# Allegro board TIDM-DELFINO-ETHERCAT_ALLEGRO.brd
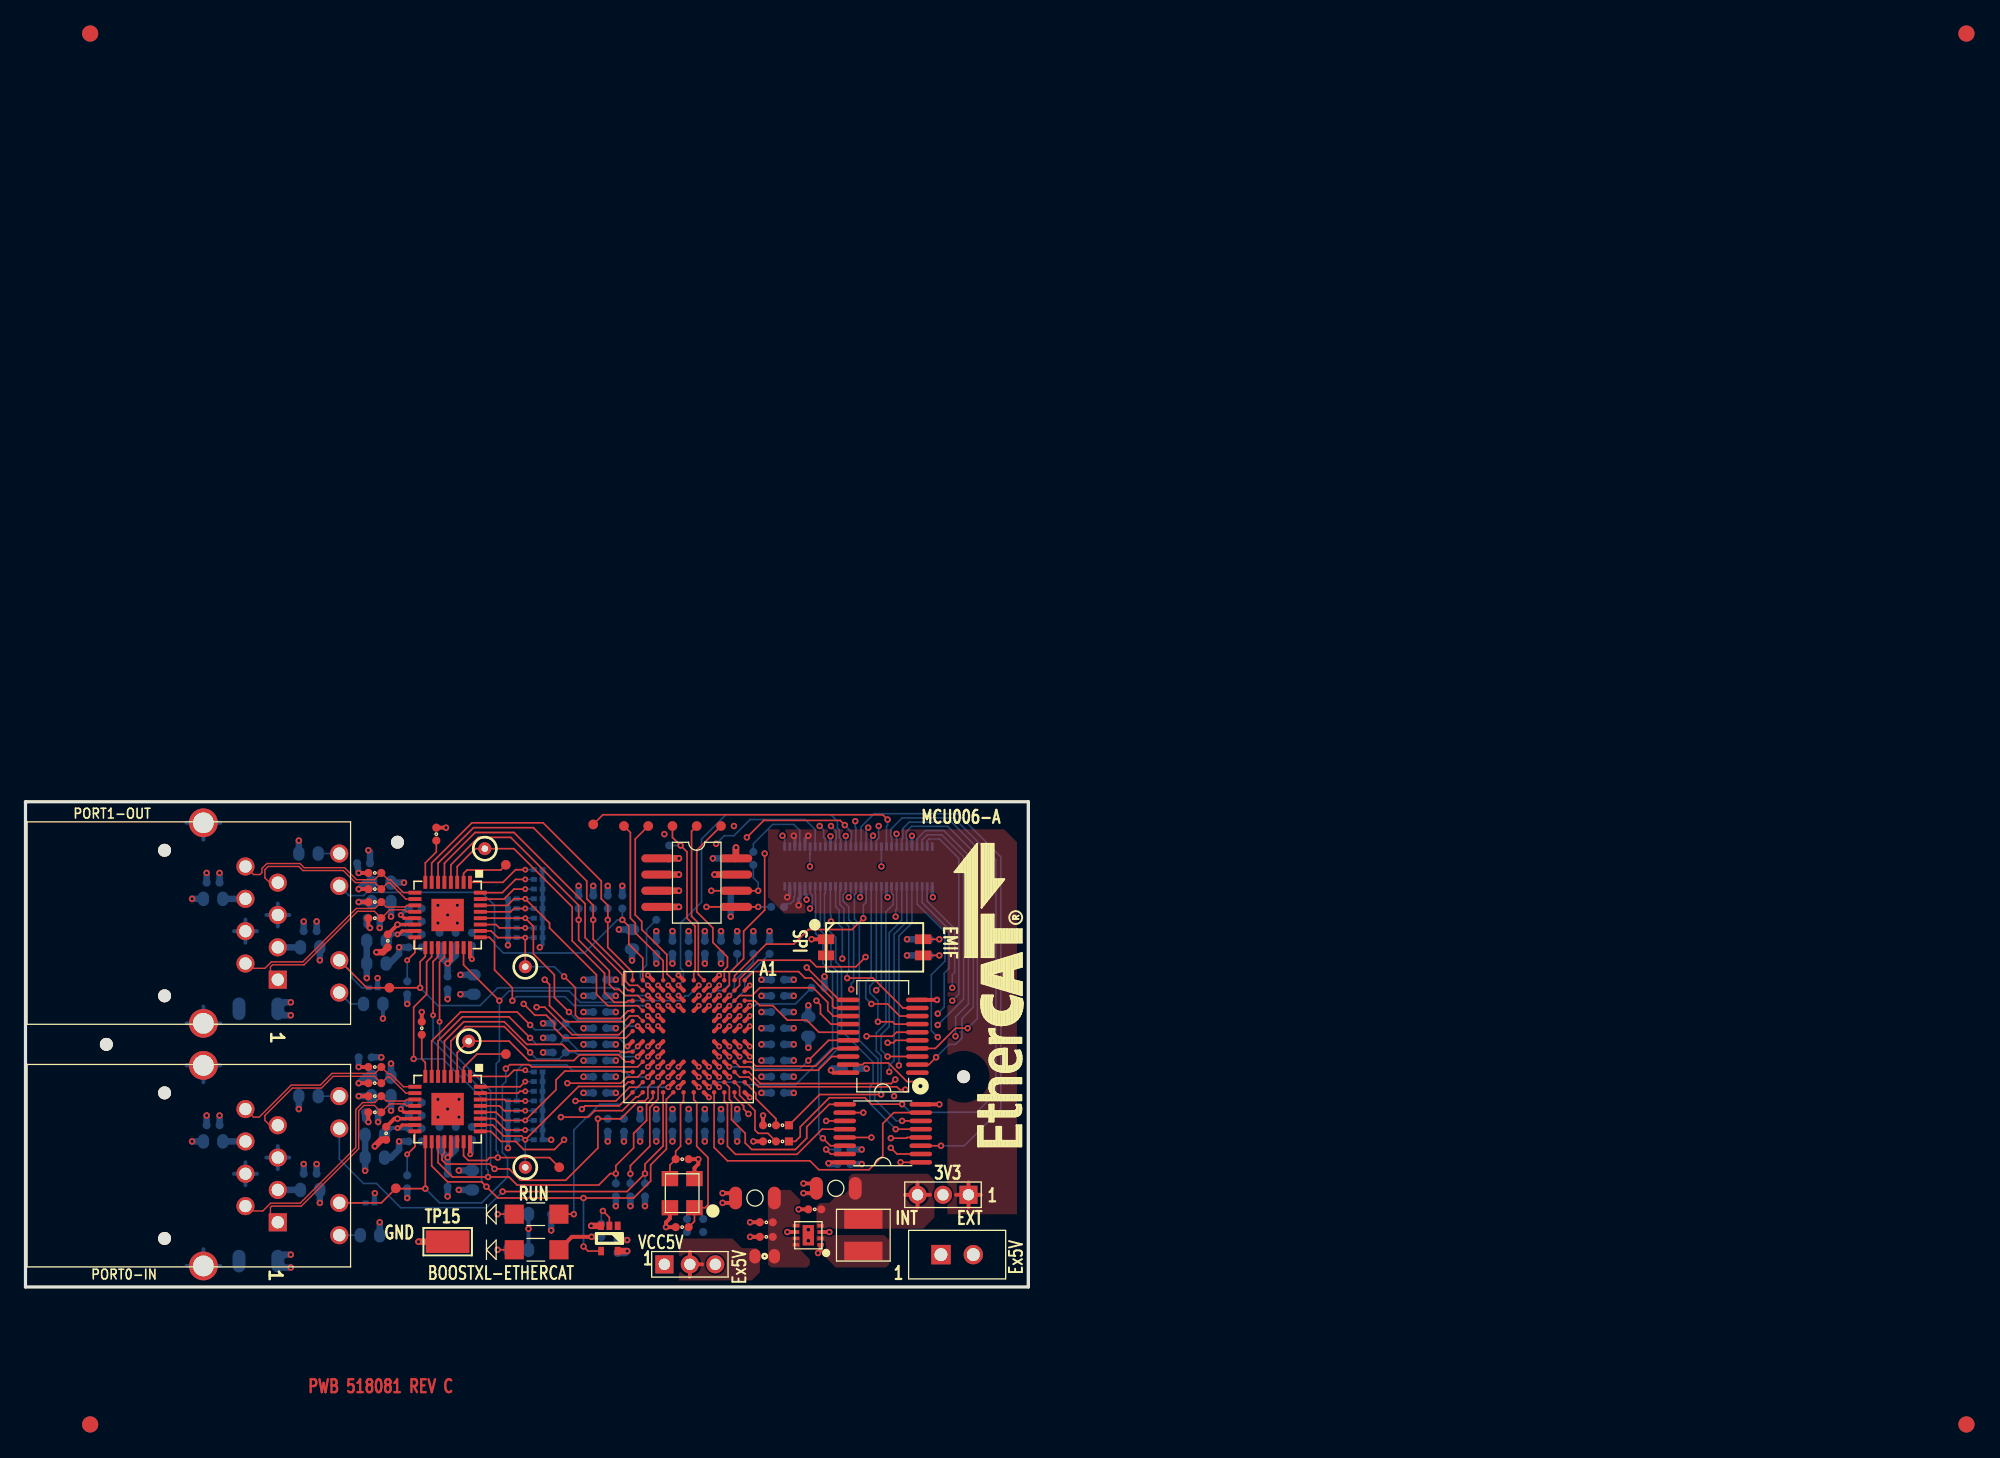
[diagram p0: board, top side]
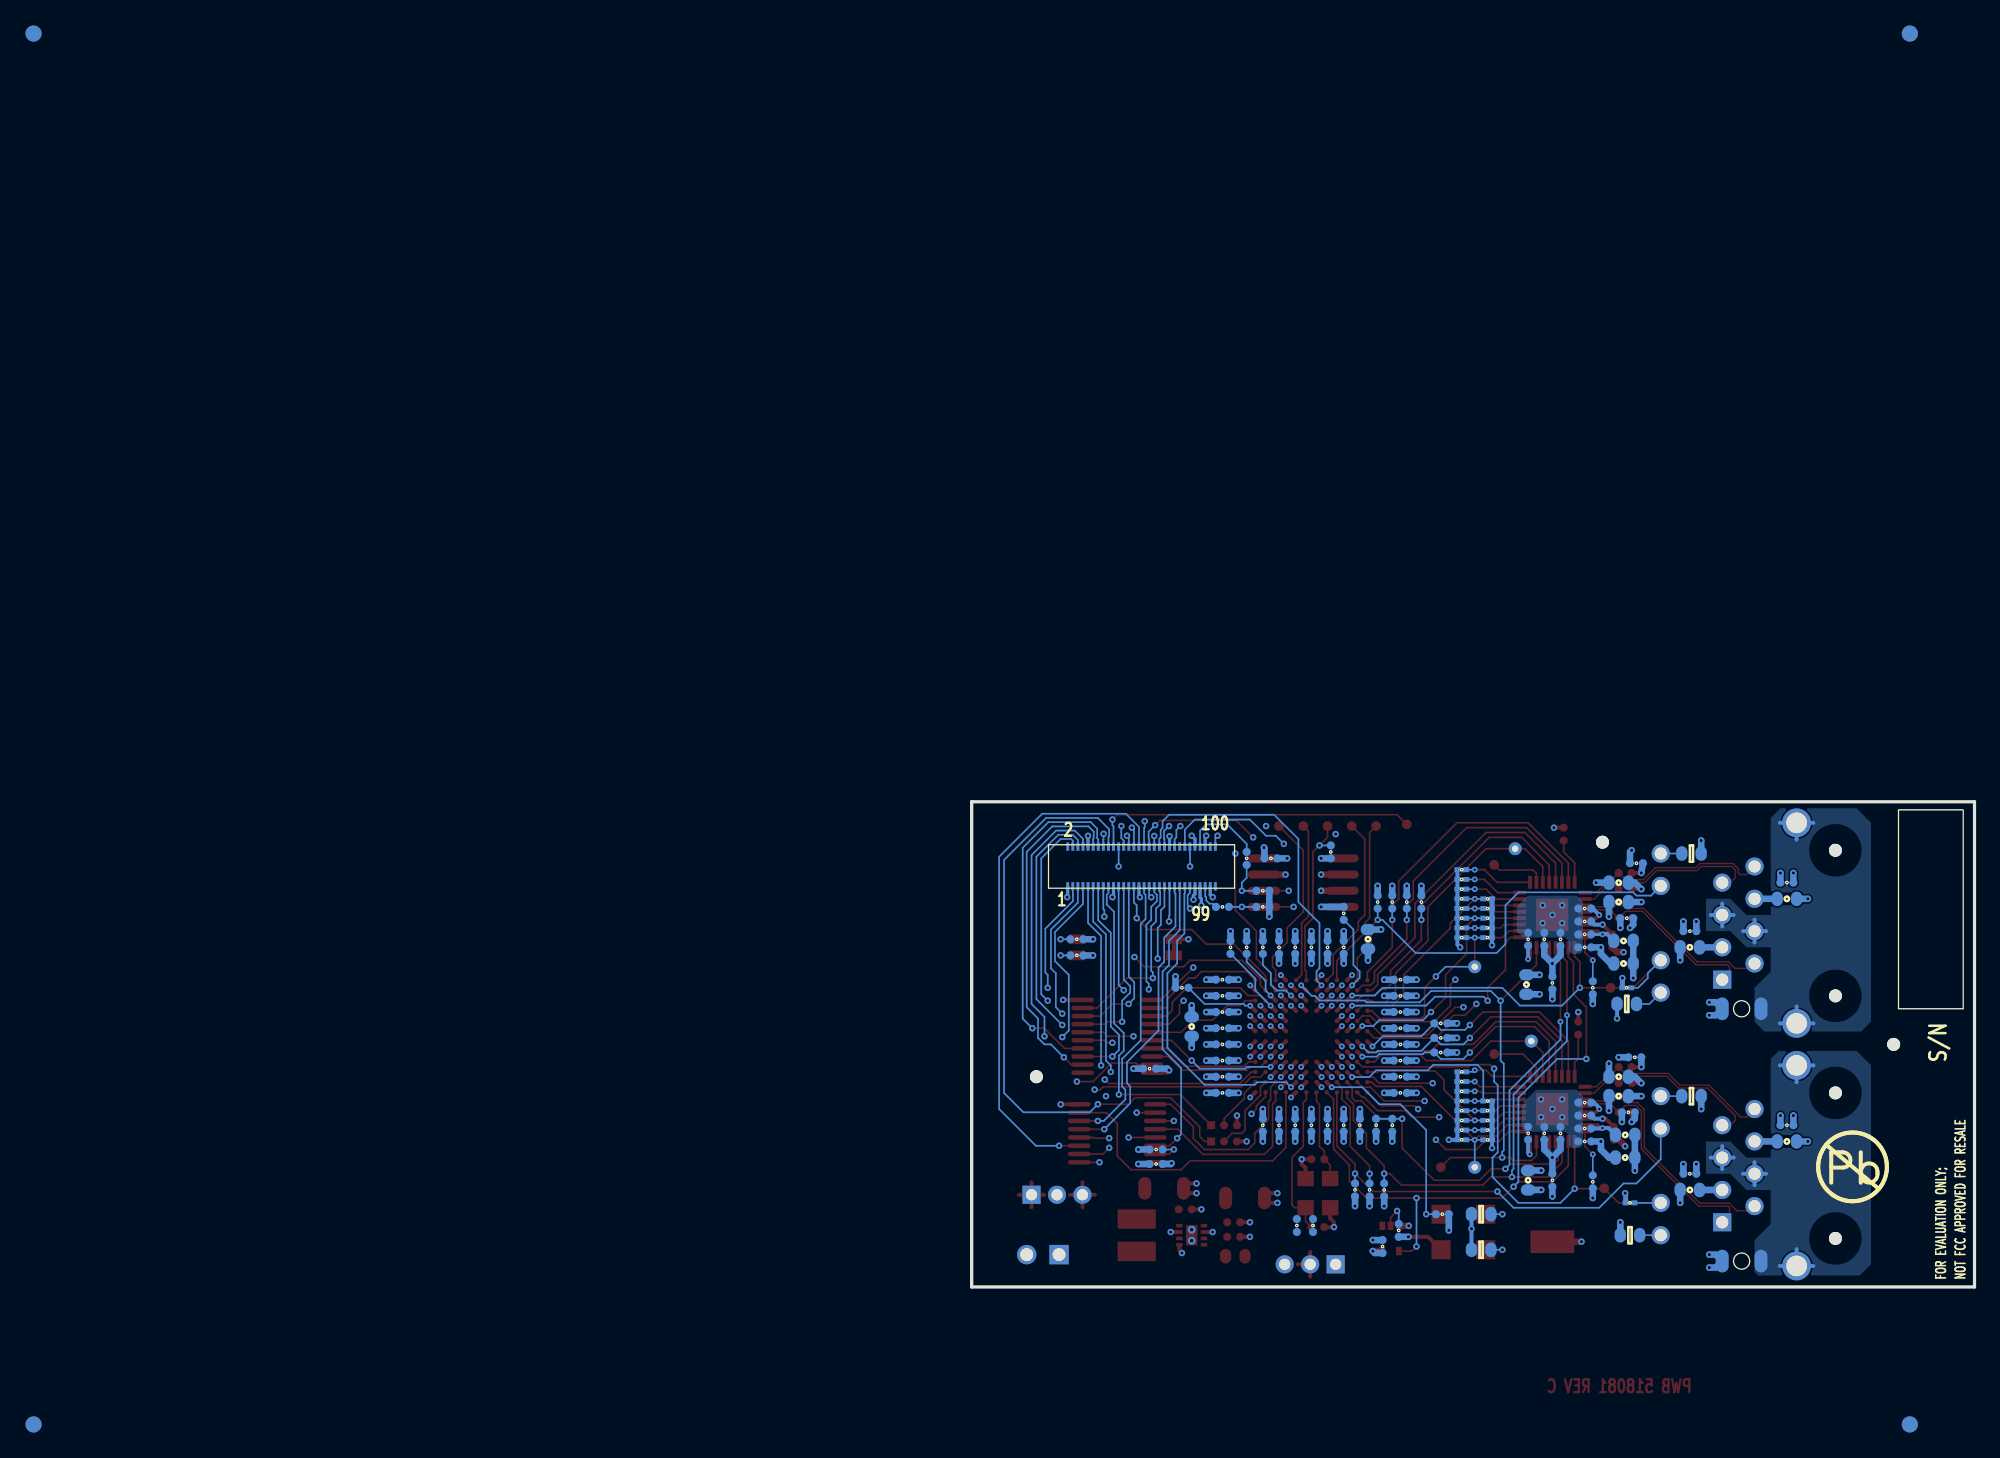
[diagram p1: board, bottom side, seen from below]

Outline 78.74 x 38.1 mm; copper layers: TOP, L2_GND, L3_ROUTE, L4_ROUTE, L5_PWR, BOTTOM. Coordinates in mm from the lower left corner of the outline.
Outline path: 0,38.1 78.74,38.1 78.74,0 0,0 0,38.1

## Design rules (mm)
net group MII0_RX1: nets MII0_RXM1 MII0_RXP1
net group MII0_TX1: nets MII0_TXM1 MII0_TXP1
net group MII1_RX1: nets MII1_RXM1 MII1_RXP1
net group MII1_TX1: nets MII1_TXM1 MII1_TXP1

## Placement (name value [footprint] x y rotation side)
C1  100pF  [C402-25]  28.45 27.18 270 top
C2  100pF  [C402-25]  28.32 12.07 270 top
C3  COMPONENTVALUE  [C402-25]  51.56 10.03 0 top
C4  X  [C1206-40X70]  63.63 7.75 180 top
C5  COMPONENTVALUE  [C402-25]  61.98 6.1 180 top
C6  X  [C1206-40X70]  57.28 6.98 180 top
C7  COMPONENTVALUE  [C402-25]  51.56 4.7 180 top
C8  COMPONENTVALUE  [C402-25]  58.17 5.08 180 top
C9  COMPONENTVALUE  [C402-25]  58.17 3.94 180 top
C10  COMPONENTVALUE  [C402-25]  46.48 3.18 90 bottom
C11  0.1uF  [C402-25]  26.54 33.27 180 bottom
C12  1uF  [C603-35X45]  27.94 31.75 0 bottom
C13  0.1uF  [C402-25]  14.73 31.75 180 bottom
C14  1uF  [C603-35X45]  14.73 30.48 180 bottom
C15  1uF  [C603-35X45]  27.94 30.23 180 bottom
C16  0.1uF  [C402-25]  30.61 29.72 0 bottom
C17  0.1uF  [C402-25]  27.3 28.96 0 bottom
C18  10nF  [C402-25]  30.61 28.7 0 bottom
C19  COMPONENTVALUE  [C402-25]  64.77 17.14 0 bottom
C20  0.1uF  [C402-25]  22.35 27.94 0 bottom
C21  0.1uF  [C402-25]  30.61 27.69 0 bottom
C22  X  [C603-35X45]  47.62 27.31 90 bottom
C23  0.1uF  [C402-25]  35.05 27.31 90 bottom
C24  10nF  [C402-25]  33.78 27.31 90 bottom
C25  1nF  [C402-25]  32.51 27.31 90 bottom
C26  10uF  [C603-35X45]  27.56 27.18 180 bottom
C27  COMPONENTVALUE  [C402-25]  54.61 26.67 90 bottom
C28  COMPONENTVALUE  [C402-25]  53.34 26.67 90 bottom
C29  COMPONENTVALUE  [C402-25]  52.07 26.67 90 bottom
C30  COMPONENTVALUE  [C402-25]  50.8 26.67 90 bottom
C31  COMPONENTVALUE  [C402-25]  49.53 26.67 90 bottom
C32  1nF  [C402-25]  30.61 26.67 0 bottom
C33  1uF  [C603-35X45]  22.35 26.67 0 bottom
C34  10uF  [C603-35X45]  27.56 25.4 180 bottom
C35  COMPONENTVALUE  [C402-25]  59.05 24.13 0 bottom
C36  COMPONENTVALUE  [C402-25]  45.09 24.13 180 bottom
C37  100pF  [C402-25]  33.15 23.88 270 bottom
C38  10uF  [C603-35X45]  35.18 23.75 270 bottom
C39  COMPONENTVALUE  [C402-25]  59.05 22.86 0 bottom
C40  COMPONENTVALUE  [C402-25]  45.09 22.86 180 bottom
C41  4700pF  [C1206-40X70]  18.29 21.84 180 bottom
C42  COMPONENTVALUE  [C402-25]  59.05 21.59 0 bottom
C43  COMPONENTVALUE  [C402-25]  45.09 21.59 180 bottom
C44  X  [C603-35X45]  61.47 20.45 90 bottom
C45  COMPONENTVALUE  [C402-25]  59.05 20.32 0 bottom
C46  COMPONENTVALUE  [C402-25]  45.09 20.32 180 bottom
C47  COMPONENTVALUE  [C402-25]  55.24 33.66 0 bottom
C48  COMPONENTVALUE  [C402-25]  59.05 19.05 0 bottom
C49  COMPONENTVALUE  [C402-25]  45.09 19.05 180 bottom
C50  0.1uF  [C402-25]  26.67 18.03 0 bottom
C51  COMPONENTVALUE  [C402-25]  59.05 17.78 0 bottom
C52  COMPONENTVALUE  [C402-25]  45.09 17.78 180 bottom
C53  COMPONENTVALUE  [C402-25]  59.05 16.51 0 bottom
C54  COMPONENTVALUE  [C402-25]  45.09 16.51 180 bottom
C55  1uF  [C603-35X45]  27.94 16.51 0 bottom
C56  COMPONENTVALUE  [C402-25]  59.05 15.24 0 bottom
C57  COMPONENTVALUE  [C402-25]  45.09 15.24 180 bottom
C58  1uF  [C603-35X45]  27.94 14.99 180 bottom
C59  0.1uF  [C402-25]  30.61 14.48 0 bottom
C60  0.1uF  [C402-25]  27.18 13.72 180 bottom
C61  10nF  [C402-25]  30.61 13.46 0 bottom
C62  COMPONENTVALUE  [C402-25]  55.88 12.7 270 bottom
C63  COMPONENTVALUE  [C402-25]  54.61 12.7 270 bottom
C64  COMPONENTVALUE  [C402-25]  53.34 12.7 270 bottom
C65  COMPONENTVALUE  [C402-25]  52.07 12.7 270 bottom
C66  COMPONENTVALUE  [C402-25]  50.8 12.7 270 bottom
C67  COMPONENTVALUE  [C402-25]  49.53 12.7 270 bottom
C68  COMPONENTVALUE  [C402-25]  48.26 12.7 270 bottom
C69  0.1uF  [C402-25]  14.73 12.7 180 bottom
C70  0.1uF  [C402-25]  30.61 12.45 0 bottom
C71  0.1uF  [C402-25]  35.05 12.07 90 bottom
C72  10nF  [C402-25]  33.78 12.07 90 bottom
C73  1nF  [C402-25]  32.51 12.07 90 bottom
C74  10uF  [C603-35X45]  27.43 11.94 180 bottom
C75  COMPONENTVALUE  [C402-25]  64.26 9.65 0 bottom
C76  1nF  [C402-25]  30.61 11.43 0 bottom
C77  1uF  [C603-35X45]  14.73 11.43 180 bottom
C78  10uF  [C603-35X45]  27.43 10.16 180 bottom
C79  0.1uF  [C402-25]  22.35 8.89 0 bottom
C80  10uF  [C603-35X45]  35.05 8.38 270 bottom
C81  100pF  [C402-25]  33.15 8.38 270 bottom
C82  1uF  [C603-35X45]  22.35 7.62 0 bottom
C83  4700pF  [C1206-40X70]  18.29 2.03 180 bottom
DS1  X  [LED1206-59X59]  40.13 5.71 0 top
DS2  X  [LED1206-59X59]  40.13 2.92 0 top
J3  X  [HDR1X3-6040-2MM]  74.04 7.24 180 top
J6  VALUE  [DF40C_60DS]  65.41 33.02 180 bottom
J9  X  [CONN2-EH]  71.88 2.54 0 top
J10  X  [HDR1X3-6040-2MM]  50.16 1.78 0 top
L1  0  [L603-35X45]  58.04 2.41 0 top
L2  X  [IND-LQH44P]  65.79 4.06 90 top
NOREF  -  []  0 103.5 0 top
NOREF#2  -  [unnamed#2]  152.4 98.42 0 top
NOREF#3  -  [unnamed#2]  5.08 -10.79 0 top
NOREF#4  -  [unnamed#2]  152.4 -10.79 0 top
NOREF#5  -  []  -259.21 -258.7 0 top
NOREF#6  -  []  0 0 90 top
NOREF#7  -  [unnamed#3]  73.66 16.51 0 top
NOREF#8  -  []  154.18 39.5 0 top
NOREF#9  -  [unnamed#2]  5.08 98.42 0 top
NOREF#10  -  [unnamed#3]  29.21 34.92 0 top
NOREF#11  -  []  0 0 0 top
NOREF#12  -  [unnamed#3]  6.35 19.05 0 top
NOREF#13  -  []  157.48 -15.88 90 top
NOREF#14  -  []  -259.21 -258.7 0 top
NOREF#15  -  [unnamed#2]  152.4 -10.79 180 bottom
NOREF#16  -  [unnamed#2]  152.4 98.42 180 bottom
NOREF#17  -  [unnamed#2]  5.08 -10.79 180 bottom
NOREF#18  -  [unnamed#2]  5.08 98.42 180 bottom
NOREF#19  -  []  12.95 5.97 180 bottom
P0  -  [RJ45-PULSE_J1-SHLD]  19.81 5.08 270 top
P1  -  [RJ45-PULSE_J1-SHLD]  19.81 24.13 270 top
R1  10K  [R402-25]  32.26 35.56 270 top
R2  49.9  [R402-25]  27.43 32.51 180 top
R3  49.9  [R402-25]  27.43 31.24 180 top
R4  49.9  [R402-25]  27.43 30.23 180 top
R5  49.9  [R402-25]  27.43 28.96 180 top
R6  COMPONENTVALUE  [R402-25]  59.05 29.85 0 bottom
R7  COMPONENTVALUE  [R402-25]  57.15 33.66 270 bottom
R8  10K  [R402-25]  31.11 20.32 270 top
R9  49.9  [R402-25]  27.43 17.27 180 top
R10  49.9  [R402-25]  27.43 16 180 top
R11  49.9  [R402-25]  27.43 14.99 180 top
R12  49.9  [R402-25]  27.43 13.72 180 top
R13  COMPONENTVALUE  [R402-25]  45.21 4.45 270 bottom
R14  X  [R603-35X45]  22.23 34.04 180 bottom
R15  2.2K  [R201-18P5X15]  40.26 32.77 0 bottom
R16  2.2K  [R201-18P5X15]  40.26 32 0 bottom
R17  2.2K  [R201-18P5X15]  40.26 31.24 0 bottom
R18  COMPONENTVALUE  [R402-25]  57.15 26.67 90 bottom
R19  COMPONENTVALUE  [R402-25]  58.42 26.67 90 bottom
R20  COMPONENTVALUE  [R402-25]  55.88 26.67 90 bottom
R21  COMPONENTVALUE  [R402-25]  50.55 34.16 90 bottom
R22  2.2K  [R201-18P5X15]  40.26 30.48 0 bottom
R23  NO-POP  [R201-18P5X15]  38.23 30.48 0 bottom
R24  COMPONENTVALUE  [R402-25]  49.53 29.34 90 bottom
R25  COMPONENTVALUE  [R402-25]  46.86 30.23 90 bottom
R26  COMPONENTVALUE  [R402-25]  45.72 30.23 90 bottom
R27  COMPONENTVALUE  [R402-25]  44.58 30.23 90 bottom
R28  COMPONENTVALUE  [R402-25]  43.43 30.23 90 bottom
R29  NO-POP  [R201-18P5X15]  40.26 29.72 0 bottom
R30  2.2K  [R201-18P5X15]  38.23 29.72 0 bottom
R31  NO-POP  [R201-18P5X15]  40.26 28.96 0 bottom
R32  2.2K  [R201-18P5X15]  38.23 28.96 0 bottom
R33  COMPONENTVALUE  [R402-25]  70.48 27.31 180 bottom
R34  COMPONENTVALUE  [R402-25]  70.48 26.04 180 bottom
R35  NO-POP  [R201-18P5X15]  40.26 28.19 0 bottom
R36  2.2K  [R201-18P5X15]  38.23 28.19 0 bottom
R37  2.2K  [R201-18P5X15]  40.26 27.43 0 bottom
R38  NO-POP  [R201-18P5X15]  38.23 27.43 0 bottom
R39  COMPONENTVALUE  [R402-25]  62.23 23.5 180 bottom
R40  4.87K 1%  [R402-25]  29.97 23.5 270 bottom
R41  2.2K  [R201-18P5X15]  27.3 23.5 180 bottom
R42  COMPONENTVALUE  [R402-25]  55.88 29.85 180 bottom
R43  330  [R603-35X45]  27.3 22.23 0 bottom
R44  COMPONENTVALUE  [R402-25]  55.88 31.11 180 bottom
R45  COMPONENTVALUE  [R402-25]  41.91 20.7 180 bottom
R46  COMPONENTVALUE  [R402-25]  41.91 19.56 180 bottom
R47  COMPONENTVALUE  [R402-25]  41.91 18.41 180 bottom
R48  2.2K  [R201-18P5X15]  40.26 16.89 0 bottom
R49  2.2K  [R201-18P5X15]  40.26 16.13 0 bottom
R50  2.2K  [R201-18P5X15]  40.26 15.37 0 bottom
R51  X  [R603-35X45]  22.23 14.99 180 bottom
R52  2.2K  [R201-18P5X15]  40.26 14.61 0 bottom
R53  NO-POP  [R201-18P5X15]  38.23 14.61 0 bottom
R54  2.2K  [R201-18P5X15]  40.26 13.84 0 bottom
R55  NO-POP  [R201-18P5X15]  38.23 13.84 0 bottom
R56  NO-POP  [R201-18P5X15]  40.26 13.08 0 bottom
R57  2.2K  [R201-18P5X15]  38.23 13.08 0 bottom
R58  COMPONENTVALUE  [R402-25]  64.26 10.8 180 bottom
R59  COMPONENTVALUE  [R402-25]  46.99 12.7 270 bottom
R60  COMPONENTVALUE  [R402-25]  45.72 12.7 270 bottom
R61  NO-POP  [R201-18P5X15]  40.26 12.32 0 bottom
R62  2.2K  [R201-18P5X15]  38.23 12.32 0 bottom
R63  2.2K  [R201-18P5X15]  40.26 11.56 0 bottom
R64  NO-POP  [R201-18P5X15]  38.23 11.56 0 bottom
R65  4.87K 1%  [R402-25]  29.97 8.26 270 bottom
R66  COMPONENTVALUE  [R402-25]  48.64 7.62 270 bottom
R67  COMPONENTVALUE  [R402-25]  47.5 7.62 270 bottom
R68  COMPONENTVALUE  [R402-25]  46.35 7.62 270 bottom
R69  2.2K  [R201-18P5X15]  27.05 6.6 180 bottom
R70  COMPONENTVALUE  [R402-25]  53.21 4.83 90 bottom
R71  COMPONENTVALUE  [R402-25]  51.94 4.83 90 bottom
R72  X  [R603-35X45]  38.73 5.71 180 bottom
R73  COMPONENTVALUE  [R402-25]  41.78 5.71 180 bottom
R74  330  [R603-35X45]  27.05 4.06 0 bottom
R75  X  [R603-35X45]  38.73 2.92 180 bottom
RJ1  COMPONENTVALUE  [JMP402-25]  59.44 12.7 180 top
RJ2  COMPONENTVALUE  [JMP402-25]  59.44 11.43 180 top
SW1  X  [SW2-30X50-TDA]  66.67 26.67 270 top
TP1  -  [TP1-4020]  36.07 34.42 0 top
TP2  COMPONENTVALUE  [TP30]  46.99 36.19 90 top
TP3  COMPONENTVALUE  [TP30]  48.9 36.19 90 top
TP4  COMPONENTVALUE  [TP30]  50.8 36.19 90 top
TP5  COMPONENTVALUE  [TP30]  52.7 36.19 90 top
TP6  COMPONENTVALUE  [TP30]  54.61 36.19 90 top
TP7  COMPONENTVALUE  [TP30]  37.72 33.15 0 top
TP8  -  [TP1-4020]  39.24 25.15 0 top
TP9  TestPoint1  [TP30]  28.57 23.5 270 top
TP10  -  [TP1-4020]  34.8 19.3 0 top
TP11  COMPONENTVALUE  [TP30]  37.72 18.29 0 top
TP12  -  [TP1-4020]  39.24 9.4 0 top
TP13  COMPONENTVALUE  [TP30]  41.91 9.4 0 top
TP14  TestPoint1  [TP30]  29.08 7.75 270 top
TP15  -  [TP1-70X135]  33.15 3.56 270 top
TP16  COMPONENTVALUE  [TP30]  44.58 36.32 0 top
U1  VALUE  [DCK-5]  45.85 3.81 180 top
U2  X  [DBQ20-14X70]  67.31 19.68 90 top
U3  TLK105  [QFN32_202SQ]  33.15 29.21 180 top
U4  X  [SO8-25X75-295]  52.7 31.75 270 top
U5  -  [BGA128-8MM]  52.07 19.68 270 top
U6  TLK105  [QFN32_202SQ]  33.15 13.97 180 top
U7  X  [TSSOP16-14X70]  67.31 12.07 90 top
U8  X  [DSG8-11X20]  61.47 4.06 90 top
Y1  -  [XTAL4-47X51-ECX32]  51.56 7.37 90 top

## Library data of the parts
C1 C2 C8 C10 C11 C16-C19 C21 C23-C25 C27-C32 C35-C37 C39 C40 C42 C43 C45 C46 C48-C54 C56 C57 C59-C68 C70-C73 C75 C76 C81 = CAP NP: Tolerance: TOLERANCE; User Part Number: USERPART#
C3 C7 = CAP NP_3: Tolerance: TOLERANCE; User Part Number: USERPART#
C4 C6 = CAP P_0
C5 C9 = CAP NP_1: Tolerance: TOLERANCE; User Part Number: USERPART#
C12 C14 C15 C26 C33 C34 C38 C55 C58 C74 C77 C78 C80 C82 = CAP NP: Tolerance: X; User Part Number: X
C13 C20 C69 C79 = CAP NP_0: Tolerance: TOLERANCE; User Part Number: USERPART#
C22 C44 = CAP NP
C41 C83 = CAP NP_0: Tolerance: X; User Part Number: X
C47 = CAP .1 uF 10% 0603: Tolerance: TOLERANCE; User Part Number: USERPART#
DS1 DS2 = LED_0
J3 J10 = HEADER 3
J6 = HEADER 30x2/SM: Tolerance: TOL; User Part Number: PART#
J9 = HEADER 2
L1 = FERRITE CHIP_0: Tolerance: X; User Part Number: X
L2 = INDUCTOR_0
P0 P1 = J1011F01PNL
R1-R12 R21 R39 R58 R70 R71 = R: Tolerance: TOLERANCE; User Part Number: USERPART#
R13 R18-R20 R24-R28 R33 R34 R40 R42 R44-R47 R59 R60 R65-R68 R73 = RESISTOR_0: Tolerance: TOLERANCE; User Part Number: USERPART#
R14 R51 R72 R75 = RESISTOR_0
R15-R17 R22 R23 R29-R32 R35-R38 R41 R48-R50 R52-R57 R61-R64 R69 = RESISTOR_0: User Part Number: USERPART#; Tolerance: TOLERANCE
R43 R74 = RESISTOR_0: User Part Number: X; Tolerance: X
RJ1 RJ2 = RJUMP3: Tolerance: TOLERANCE; User Part Number: USERPART#
SW1 = SW DIP-2
TP1 TP8 TP10 TP12 = TEST POINT_1
TP2-TP7 TP9 TP11 TP13 TP14 TP16 = TestPoint1: Tolerance: TOLERANCE; User Part Number: USERPART#
TP15 = SMT-TP
U1 = SN74LVC1GU04_0: Tolerance: TOL; User Part Number: PART#
U2 = 74PCT245_0
U3 U6 = TLK105: Tolerance: TOL; User Part Number: PART#
U4 = 24WC256
U5 = ET1100
U7 = SN74CBT3257PW
U8 = TPS62000
Y1 = CRYSTAL 4-PIN_0

## Footprints (pads in the part's own frame, mm; a bottom-side part is the same pattern mirrored in y, then rotated)
BGA128-8MM
  round 0.351 smd: A1(-4.401,4.401) A2(-3.6,4.401) A3(-2.8,4.401) A4(-2,4.401) A5(-1.2,4.401) A6(-0.4,4.401) A7(0.4,4.401) A8(1.2,4.401) A9(2,4.401) A10(2.8,4.401) A11(3.6,4.401) A12(4.401,4.401) B1(-4.401,3.6) B2(-3.6,3.6) B3(-2.8,3.6) B4(-2,3.6) B5(-1.2,3.6) B6(-0.4,3.6) B7(0.4,3.6) B8(1.2,3.6) B9(2,3.6) B10(2.8,3.6) B11(3.6,3.6) B12(4.401,3.6) C1(-4.401,2.8) C2(-3.6,2.8) C3(-2.8,2.8) C4(-2,2.8) C5(-1.2,2.8) C6(-0.4,2.8) C7(0.4,2.8) C8(1.2,2.8) C9(2,2.8) C10(2.8,2.8) C11(3.6,2.8) C12(4.401,2.8) D1(-4.401,2) D2(-3.6,2) D3(-2.8,2) D4(-2,2) D5(-1.2,2) D6(-0.4,2) D7(0.4,2) D8(1.2,2) D9(2,2) D10(2.8,2) D11(3.6,2) D12(4.401,2) E1(-4.401,1.2) E2(-3.6,1.2) E3(-2.8,1.2) E4(-2,1.2) E9(2,1.2) E10(2.8,1.2) E11(3.6,1.2) E12(4.401,1.2) F1(-4.401,0.4) F2(-3.6,0.4) F3(-2.8,0.4) F4(-2,0.4) F9(2,0.4) F10(2.8,0.4) F11(3.6,0.4) F12(4.401,0.4) G1(-4.401,-0.4) G2(-3.6,-0.4) G3(-2.8,-0.4) G4(-2,-0.4) G9(2,-0.4) G10(2.8,-0.4) G11(3.6,-0.4) G12(4.401,-0.4) H1(-4.401,-1.2) H2(-3.6,-1.2) H3(-2.8,-1.2) H4(-2,-1.2) H9(2,-1.2) H10(2.8,-1.2) H11(3.6,-1.2) H12(4.401,-1.2) J1(-4.401,-2) J2(-3.6,-2) J3(-2.8,-2) J4(-2,-2) J5(-1.2,-2) J6(-0.4,-2) J7(0.4,-2) J8(1.2,-2) J9(2,-2) J10(2.8,-2) J11(3.6,-2) J12(4.401,-2) K1(-4.401,-2.8) K2(-3.6,-2.8) K3(-2.8,-2.8) K4(-2,-2.8) K5(-1.2,-2.8) K6(-0.4,-2.8) K7(0.4,-2.8) K8(1.2,-2.8) K9(2,-2.8) K10(2.8,-2.8) K11(3.6,-2.8) K12(4.401,-2.8) L1(-4.401,-3.6) L2(-3.6,-3.6) L3(-2.8,-3.6) L4(-2,-3.6) L5(-1.2,-3.6) L6(-0.4,-3.6) L7(0.4,-3.6) L8(1.2,-3.6) L9(2,-3.6) L10(2.8,-3.6) L11(3.6,-3.6) L12(4.401,-3.6) M1(-4.401,-4.401) M2(-3.6,-4.401) M3(-2.8,-4.401) M4(-2,-4.401) M5(-1.2,-4.401) M6(-0.4,-4.401) M7(0.4,-4.401) M8(1.2,-4.401) M9(2,-4.401) M10(2.8,-4.401) M11(3.6,-4.401) M12(4.401,-4.401)
C402-25
  round 0.635 smd: 1(-0.508,0) 2(0.508,0)
C603-35X45
  oval 0.889x1.143 smd: 1(-0.762,0) 2(0.762,0)
C1206-40X70
  oval 1.016x1.778 smd: 1(-1.524,0) 2(1.524,0)
CONN2-EH
  rect 1.524x1.524 hole 1.016: 1(0,0)
  round 1.524 hole 1.016: 2(2.54,0)
DBQ20-14X70
  oval 0.356x1.778 smd: 1(-2.857,-2.718) 2(-2.223,-2.718) 3(-1.587,-2.718) 4(-0.953,-2.718) 5(-0.318,-2.718) 6(0.318,-2.718) 7(0.953,-2.718) 8(1.587,-2.718) 9(2.223,-2.718) 10(2.857,-2.718) 11(2.857,2.718) 12(2.223,2.718) 13(1.587,2.718) 14(0.953,2.718) 15(0.318,2.718) 16(-0.318,2.718) 17(-0.953,2.718) 18(-1.587,2.718) 19(-2.223,2.718) 20(-2.857,2.718)
DCK-5
  rect 0.46x0.66 smd: 1(-0.65,-0.991) 2(0,-0.991) 3(0.65,-0.991) 4(0.65,0.991) 5(-0.65,0.991)
DF40C_60DS
  rect 0.229x0.66 smd: 1(-5.796,-1.56) 2(-5.796,1.56) 3(-5.397,-1.56) 4(-5.397,1.56) 5(-4.999,-1.56) 6(-4.999,1.56) 7(-4.597,-1.56) 8(-4.597,1.56) 9(-4.199,-1.56) 10(-4.199,1.56) 11(-3.797,-1.56) 12(-3.797,1.56) 13(-3.399,-1.56) 14(-3.399,1.56) 15(-3,-1.56) 16(-3,1.56) 17(-2.598,-1.56) 18(-2.598,1.56) 19(-2.2,-1.56) 20(-2.2,1.56) 21(-1.798,-1.56) 22(-1.798,1.56) 23(-1.4,-1.56) 24(-1.4,1.56) 25(-1.001,-1.56) 26(-1.001,1.56) 27(-0.599,-1.56) 28(-0.599,1.56) 29(-0.201,-1.56) 30(-0.201,1.56) 31(0.201,-1.56) 32(0.201,1.56) 33(0.599,-1.56) 34(0.599,1.56) 35(0.998,-1.56) 36(0.998,1.56) 37(1.4,-1.56) 38(1.4,1.56) 39(1.798,-1.56) 40(1.798,1.56) 41(2.2,-1.56) 42(2.2,1.56) 43(2.598,-1.56) 44(2.598,1.56) 45(2.997,-1.56) 46(2.997,1.56) 47(3.399,-1.56) 48(3.399,1.56) 49(3.797,-1.56) 50(3.797,1.56) 51(4.199,-1.56) 52(4.199,1.56) 53(4.597,-1.56) 54(4.597,1.56) 55(4.999,-1.56) 56(4.999,1.56) 57(5.397,-1.56) 58(5.397,1.56) 59(5.796,-1.56) 60(5.796,1.56)
DSG8-11X20
  rect 0.279x0.508 smd: 1(-0.75,-0.965) 2(-0.25,-0.965) 3(0.25,-0.965) 4(0.75,-0.965) 5(0.75,0.965) 6(0.25,0.965) 7(-0.25,0.965) 8(-0.75,0.965)
  rect 1.6x0.889 smd: 9(0,0)
HDR1X3-6040-2MM
  rect 1.422x1.422 hole 0.889: 1(0,0)
  round 1.422 hole 0.889: 2(1.999,0) 3(3.998,0)
IND-LQH44P
  rect 1.524x2.997 smd: 1(-1.27,0) 2(1.27,0)
JMP402-25
  rect 0.635x0.635 smd: 1(-0.508,0)
  round 0.635 smd: 2(0.508,0) 3(1.524,0)
L603-35X45
  oval 0.889x1.143 smd: 1(-0.762,0) 2(0.762,0)
LED1206-59X59
  rect 1.499x1.499 smd: 1(-1.753,0) 2(1.753,0)
QFN32_202SQ
  rect 0.305x1.016 smd: 1(-1.753,-2.565) 2(-1.252,-2.565) 3(-0.752,-2.565) 4(-0.251,-2.565) 5(0.251,-2.565) 6(0.752,-2.565) 7(1.252,-2.565) 8(1.753,-2.565) 17(1.753,2.565) 18(1.252,2.565) 19(0.752,2.565) 20(0.251,2.565) 21(-0.251,2.565) 22(-0.752,2.565) 23(-1.252,2.565) 24(-1.753,2.565)
  rect 1.016x0.305 smd: 9(2.565,-1.753) 10(2.565,-1.252) 11(2.565,-0.752) 12(2.565,-0.251) 13(2.565,0.251) 14(2.565,0.752) 15(2.565,1.252) 16(2.565,1.753) 25(-2.565,1.753) 26(-2.565,1.252) 27(-2.565,0.752) 28(-2.565,0.251) 29(-2.565,-0.251) 30(-2.565,-0.752) 31(-2.565,-1.252) 32(-2.565,-1.753)
  rect 2.54x2.54 smd: 33(0,0)
R201-18P5X15
  rect 0.47x0.381 smd: 1(-0.343,0) 2(0.343,0)
R402-25
  round 0.635 smd: 1(-0.508,0) 2(0.508,0)
R603-35X45
  oval 0.889x1.143 smd: 1(-0.762,0) 2(0.762,0)
RJ45-PULSE_J1-SHLD
  round 1.016 hole 3.251 unplated: (-10.16,-8.89) (1.27,-8.89)
  rect 1.422x1.422 hole 0.965: 1(0,0)
  round 1.422 hole 0.965: 2(-1.27,-2.54) 3(-2.54,0) 4(-3.81,-2.54) 5(-5.08,0) 6(-6.35,-2.54) 7(-7.62,0) 8(-8.89,-2.54) 9(1.016,4.826) 10(-1.524,4.826) 11(-7.366,4.826) 12(-9.906,4.826)
  round 2.261 hole 1.626: 13(-12.319,-5.842) 14(3.429,-5.842)
SO8-25X75-295
  oval 0.635x2.54 smd: 1(-1.905,-3.086) 2(-0.635,-3.086) 3(0.635,-3.086) 4(1.905,-3.086) 5(1.905,3.086) 6(0.635,3.086) 7(-0.635,3.086) 8(-1.905,3.086)
SW2-30X50-TDA
  rect 0.762x1.27 smd: 1(-0.635,-3.81) 2(0.635,-3.81) 3(0.635,3.81) 4(-0.635,3.81)
TP1-70X135
  rect 1.778x3.429 smd: 1(0,0)
TP1-4020
  round 1.016 hole 0.508: 1(0,0)
TP30
  round 0.762 smd: 1(0,0)
TSSOP16-14X70
  oval 0.356x1.778 smd: 1(-2.276,-2.987) 2(-1.626,-2.987) 3(-0.975,-2.987) 4(-0.325,-2.987) 5(0.325,-2.987) 6(0.975,-2.987) 7(1.626,-2.987) 8(2.276,-2.987) 9(2.276,2.987) 10(1.626,2.987) 11(0.975,2.987) 12(0.325,2.987) 13(-0.325,2.987) 14(-0.975,2.987) 15(-1.626,2.987) 16(-2.276,2.987)
unnamed#2
  round 1.27 smd: 1(0,0)
unnamed#3
  round 1.016 hole 2.489 unplated: (0,0)
XTAL4-47X51-ECX32
  rect 1.194x1.295 smd: 1(-1.143,-0.965) 2(1.143,-0.965) 3(1.143,0.965) 4(-1.143,0.965)

## Nets
GND: C1.2 C2.2 C3.2 C4.2 C5.2 C6.2 C7.2 C8.2 C9.2 C10.2 C11.1 C12.2 C13.2 C14.2 C15.1 C16.2 C17.2 C18.2 C19.2 C20.2 C21.2 C22.2 C23.2 C24.2 C25.2 C26.2 C27.2 C28.2 C29.2 C30.2 C31.2 C32.2 C33.2 C34.2 C35.2 C36.2 C37.2 C38.2 C39.2 C40.2 C41.1 C42.2 C43.2 C44.2 C45.2 C46.2 C47.1 C48.2 C49.2 C50.2 C51.2 C52.2 C53.2 C54.2 C55.2 C56.2 C57.2 C58.1 C59.2 C60.1 C61.2 C62.2 C63.2 C64.2 C65.2 C66.2 C67.2 C68.2 C69.2 C70.2 C71.2 C72.2 C73.2 C74.2 C75.2 C76.2 C77.2 C78.2 C79.2 C80.2 C81.2 C82.2 C83.1 J6.1 J6.10 J6.19 J6.29 J6.42 J6.51 J9.2 R15.2 R16.2 R17.2 R18.2 R19.2 R20.2 R21.1 R22.2 R24.2 R26.2 R27.2 R28.2 R29.2 R31.2 R35.2 R37.2 R39.1 R40.2 R45.2 R46.2 R47.2 R48.2 R49.2 R50.2 R52.2 R54.2 R56.2 R58.1 R59.2 R61.2 R63.2 R65.2 R67.2 R72.1 R73.2 R75.1 RJ1.3 RJ2.3 SW1.1(A1) SW1.2(A2) TP15.1 U1.3(GND) U2.10(GND) U3.33(GND) U4.1(A0) U4.2(A1) U4.3(NC) U4.4(VSS) U4.7(WP) U5.C8(NC5) U5.D4(GNDIO1) U5.D5(GNDIO0) U5.D6(GNDCORE0) U5.D7(GNDCORE3) U5.D8(NC8) U5.D9(GNDIO7) U5.E4(NC1) U5.E10(NC4) U5.F4(NC7) U5.F9(GNDIO6) U5.G3(NC2) U5.G4(NC3) U5.G9(GNDPLL) U5.H3(TESTMODE) U5.H4(TCFG[1]GNDIO9) U5.H10(NC6) U5.J4(GNDIO2) U5.J5(GNDIO3) U5.J6(GNDCORE1) U5.J7(GNDCORE2) U5.J8(GNDIO4) U5.J9(GNDIO5) U5.K9(TCFG[2]/GNDIO10) U6.33(GND) U7.8(GND) U8.1(PGND) U8.3(AGND) U8.6(MODE) U8.9(PAD) Y1.2(C1) Y1.4(C2)
VCC_2V5: C42.1 C43.1 C44.1 C45.1 C46.1 C48.1 C49.1 C51.1 C52.1 C65.1 C66.1 U5.C6(VCCCORE0) U5.C7(VCCCORE3) U5.G10(VCCPLL) U5.K6(VCCCORE1) U5.K7(VCCCORE2)
VCC_3V3: J3.1 J6.52 J6.53 J6.56 J6.57
VCC_5V: J10.1
CLK_MODE[0]: R67.1 U5.J11(PERR{0}/TRANS{0}/CLK-MODE[0])
CLK_MODE[1]: R24.1 U5.K2(PERR{1}/TRANS{1}/CLK-MODE[1])
EEPROM_SIZE: DS1.2(ANODE) R73.1 U5.H11(RUN/EEPROM-SIZE)
EM2A9: J6.12 U2.2(A1)
EM2A10: J6.13 U2.3(A2)
EM2A11: J6.14 U2.4(A3)
EM2D1: J6.22 U2.5(A4)
EM2D2: J6.23 U2.7(A6)
EM2D3: J6.24 U2.6(A5)
EM2D4: J6.25 U2.8(A7)
EM2D11: J6.37 U2.9(A8)
ET_ADDR1: J6.3 U5.B5(PDI[21]/LINK_MII{3})
ET_ADDR2: J6.4 U5.A5(PDI[20]/RX_D{3}[3])
ET_ADDR3: J6.5 U5.B6(PDI[19]/RX_D{3}[2])
ET_ADDR4: J6.6 U5.A6(PDI[18]/RX_D{3}[0])
ET_ADDR5: J6.7 U5.B7(PDI[17]/RX_CLK{3})
ET_ADDR6: J6.8 U5.A7(PDI[16]/RX_ERR{3})
ET_ADDR7: J6.9 U5.B8(PDI[15])
ET_ADDR8: J6.11 U5.A8(PDI[14])
ET_ADDR9: U2.18(B1) U5.B9(PDI[13])
ET_ADDR10: U2.17(B2) U5.A9(PDI[12])
ET_ADDR11: U2.16(B3) U5.C9(PDI[11])
ET_ADDR12: J6.15 U5.A10(PDI[10])
ET_ADDR13: J6.16 U5.B10(PDI[09])
ET_ADDR14: RJ1.2 U5.A11(PDI[08])
ET_ADDR15: RJ2.2 U5.B11(PDI[07]/CPU_CLK_OUT)
ET_BUSY: J6.50 U7.11(3B1)
ET_BUSY/SPI_DO: U5.C11(PDI[03]) U7.9(3A)
ET_CS: J6.43 U7.5(2B1)
ET_CS/SPI_CLK: U5.D12(PDI[00]) U7.7(2A)
ET_DATA0: J6.21 U5.B4(PDI[23]/TX_D{3}[2])
ET_DATA1: U2.15(B4) U5.A3(PDI[24]/TX_D{3}[1]/EBUS{3}-TX-)
ET_DATA2: U2.13(B6) U5.B3(PDI[25]/TX_D{3}[0])
ET_DATA3: U2.14(B5) U5.A2(PDI[26]/TX_ENA{3}/EBUS{3}-TX+)
ET_DATA4: U2.12(B7) U5.A1(PDI[27]/RX_DV{3}/EBUS{3}-RX-)
ET_DATA5: J6.26 U5.B2(PDI[28]/PERR{3}/TRANS{3})
ET_DATA6: J6.27 U5.B1(PDI[29]/RX_D{3}[1]/EBUS{3}-RX+)
ET_DATA7: J6.28 U5.C2(PDI[30]/LINKACT{3}/P_CONF[3])
ET_DATA8: J6.34 U5.D1(PDI[32]/TX_D{2}[3])
ET_DATA9: J6.35 U5.D2(PDI[33]/TX_D{2}[2])
ET_DATA10: J6.36 U5.E2(PDI[34]/TX_D{2}[0]/CTL/STAT-MOV)
ET_DATA11: U2.11(B8) U5.G1(PDI[35]/RX_ERR{2})
ET_DATA12: J6.38 U5.G2(PDI[36]/RX_CLK{2})
ET_DATA13: J6.39 U5.H2(PDI[37]/RX_D{2}[0])
ET_DATA14: J6.40 U5.J2(PDI[38]/RX_D{2}[2])
ET_DATA15: J6.41 U5.K1(PDI[39]/RX_D{2}[3])
ET_EE_LOADED: J6.20 TP16.1 U5.A12(PDI[06])
ET_IRQ/SPI_IRQ: J6.49 U5.B12(PDI[04])
ET_RD: J6.44 U7.2(1B1)
ET_RD/SPI_SEL: U5.D11(PDI[01]) U7.4(1A)
ET_RESETN: J6.60 R13.1 U1.2(I)
ET_SCL: R7.2 R44.1 U4.6(SCL) U5.G11(EEPROM CLK)
ET_SDA: R6.1 R42.1 U4.5(SDA) U5.F11(EEPROM DATA)
ET_SPI_CLK: J6.31 U7.6(2B2)
ET_SPI_DI: J6.32 U7.13(4B2)
ET_SPI_DO: J6.33 U7.10(3B2)
ET_SPI_SEL: J6.30 U7.3(1B2)
ET_SYNC0: J6.47 U5.E11(SYNC[0]/LATCH[0])
ET_SYNC1: J6.48 U5.E12(SYNC[1]/LATCH[1])
ET_WR: J6.45 U7.14(4B1)
ET_WR/SPI_DI: U5.C12(PDI[02]) U7.12(4A)
EVM_3V3: C1.1 C2.1 C10.1 C11.2 C12.1 C13.1 C14.1 C15.2 C17.1 C18.1 C19.1 C20.1 C22.1 C24.1 C25.1 C27.1 C28.1 C29.1 C30.1 C31.1 C32.1 C33.1 C34.1 C35.1 C36.1 C37.1 C38.1 C39.1 C40.1 C47.2 C50.1 C53.1 C54.1 C55.1 C56.1 C57.1 C58.2 C60.2 C61.1 C62.1 C63.1 C64.1 C67.1 C68.1 C69.1 C72.1 C73.1 C75.1 C76.1 C77.1 C78.1 C79.1 C80.1 C81.1 C82.1 DS2.2(ANODE) J3.2 P0.3(TDCT) P0.6(RDCT) P1.3(TDCT) P1.6(RDCT) R1.1 R2.2 R3.2 R4.2 R5.2 R8.1 R9.2 R10.2 R11.2 R12.2 R13.2 R14.2 R23.1 R25.2 R30.1 R32.1 R33.2 R34.2 R36.1 R38.1 R41.1 R42.2 R43.2 R44.2 R51.2 R53.1 R55.1 R57.1 R60.2 R62.1 R64.1 R66.2 R68.2 R69.1 R74.2 U1.5(VCC) U2.20(VCC) U3.14(AVDD33) U3.21(VDD33_IO) U4.8(VCC) U5.C5(VCCIO0) U5.D3(VCCIO1) U5.D10(VCCIO7) U5.E9(VCCIO8) U5.F3(TCFG[0]/VCCIO10) U5.F10(VCCIO6) U5.H9(TCFG[3]/VCCIO11) U5.J3(VCCIO2) U5.J10(VCCIO5) U5.K5(VCCIO3) U5.K8(VCCIO4) U6.14(AVDD33) U6.21(VDD33_IO) U7.16(VCC)
GPIO93: J6.17 RJ1.1
GPIO94: J6.18 RJ2.1
MII0_RXM1: P0.8(RD-) R9.1 U6.9(RD-)
MII0_RXP1: P0.7(RD+) R10.1 U6.10(RD+)
MII0_TXM1: P0.2(TD-) R11.1 U6.11(TD-)
MII0_TXP1: P0.1(TD+) R12.1 U6.12(TD+)
MII1_RXM1: P1.8(RD-) R2.1 U3.9(RD-)
MII1_RXP1: P1.7(RD+) R3.1 U3.10(RD+)
MII1_TXM1: P1.2(TD-) R4.1 U3.11(TD-)
MII1_TXP1: P1.1(TD+) R5.1 U3.12(TD+)
P_CONF[2]: R20.1 U5.E3(LINKACT{2}/P-CONF[2])
PFBOUT0: C59.1 C70.1 C71.1 C74.1 U6.13(PFBIN1) U6.15(PFBOUT) U6.24(PFBIN2)
PFBOUT1: C16.1 C21.1 C23.1 C26.1 U3.13(PFBIN1) U3.15(PFBOUT) U3.24(PFBIN2)
PHYAD_OFF: R18.1 U5.C3(PERR{2}/TRANS{2}/PHYADD-OFF)
PR2_MDIO_DATA: R68.1 U3.19(MDIO) U5.K12(MI_DATA) U6.19(MDIO)
PR2_MDIO_MDCLK: R59.1 R60.1 U3.20(MDC) U5.K11(MI_CLK/LINKPOL) U6.20(MDC)
PR2_MII0_LINKACT: P0.11(C_LEFT) R66.1 U5.J12(LINKACT{0}/P-CONFIG[0])
PR2_MII0_RXCLK: U5.L10(RX_CLK{0}) U6.25(RX_CLK)
PR2_MII0_RXD0: R52.1 R53.2 U5.K10(RX_D{0}[0]) U6.30(RXD_0/PHYAD1)
PR2_MII0_RXD1: R50.1 U5.M12(RX_D{0}[1]/EBUS{0}-RX+) U6.31(RXD_1/PHYAD2)
PR2_MII0_RXD2: R49.1 U5.L11(RX_D{0}[2]) U6.32(RXD_2/PHYAD3)
PR2_MII0_RXD3: R48.1 U5.L12(RX_D{0}[3]) U6.1(RXD_3/PHYAD4)
PR2_MII0_RXDV: R63.1 R64.2 TP12.1 U5.M11(RX_DV{0}/EBUS{0}-RX-) U6.26(RX_DV/MII_MODE)
PR2_MII0_RXER: R56.1 R57.2 U5.M10(RX_ERR{0}) U6.28(RX_ER/AMDIX_EN)
PR2_MII0_RXLINK: P0.10(C_RIGHT) R69.2 TP14.1 U5.L9(LINK_MII{0}) U6.17(LED_LINK/AN_0)
PR2_MII0_TXD0: R47.1 U5.L8(TX_D{0}[0]/C25_ENA) U6.4(TXD0)
PR2_MII0_TXD1: U5.M8(TX_D{0}[1]/EBUS{0}-TX-) U6.5(TXD1)
PR2_MII0_TXD2: R46.1 U5.L7(TX_D{0}[2]\C25_SHI[0]) U6.6(TXD2)
PR2_MII0_TXD3: R45.1 U5.M7(TX_D{0}[3]\C25_SHI[1]) U6.7(TXD3)
PR2_MII0_TXEN: TP10.1 U5.M9(TX_ENA{0}/EBUS{0}-TX+) U6.3(TX_EN)
PR2_MII1_LINKACT: P1.11(C_LEFT) R25.1 U5.L1(LINKACT{1}/P-CONF[1])
PR2_MII1_RXCLK: U3.25(RX_CLK) U5.K4(RX_CLK{1})
PR2_MII1_RXD0: R22.1 R23.2 U3.30(RXD_0/PHYAD1) U5.L4(RX_D{1}[0])
PR2_MII1_RXD1: R17.1 U3.31(RXD_1/PHYAD2) U5.M5(RX_D{1}[1]/EBUS{1}-RX+)
PR2_MII1_RXD2: R16.1 U3.32(RXD_2/PHYAD3) U5.L5(RX_D{1}[2])
PR2_MII1_RXD3: R15.1 U3.1(RXD_3/PHYAD4) U5.M6(RX_D{1}[3])
PR2_MII1_RXDV: R37.1 R38.2 TP8.1 U3.26(RX_DV/MII_MODE) U5.M4(RX_DV{1}/EBUS{1}-RX-)
PR2_MII1_RXER: R31.1 R32.2 U3.28(RX_ER/AMDIX_EN) U5.L6(RX_ERR{1})
PR2_MII1_RXLINK: P1.10(C_RIGHT) R41.2 TP9.1 U3.17(LED_LINK/AN_0) U5.K3(LINK_MII{1})
PR2_MII1_TXD0: R28.1 U3.4(TXD0) U5.L3(TX_D{1}[0]/TRANS-MODE-ENA)
PR2_MII1_TXD1: U3.5(TXD1) U5.M2(TX_D{1}[1]/EBUS{1}-TX-)
PR2_MII1_TXD2: R27.1 U3.6(TXD2) U5.L2(TX_D{1}[2]/P-MODE[0])
PR2_MII1_TXD3: R26.1 U3.7(TXD3) U5.M1(TX_D{1}[3]/P-MODE[1])
PR2_MII1_TXEN: TP1.1 U3.3(TX_EN) U5.M3(TX_ENA{1}/EBUS{1}-TX+)
PR2_MII_RESETN: U1.4(O) U3.18(RESETN) U5.H12(RESETN) U6.18(RESETN)
PR2_MII_XI: TP13.1 U3.23(XI) U5.F2(LINK_MII{2}/CLK25OUT) U6.23(XI)
REG_5V_IN: J10.2 L1.1
N21750864: R54.1 R55.2 U6.29(COL/PHYAD0)
N21750872: R61.1 R62.2 U6.27(CRS/CRS_DV/LED_CFG)
N21750878: R65.1 U6.16(RBIAS)
N21751363: P0.9(A_RIGHT) R74.1
N21751679: C83.2 P0.4(CHS_GND4) P0.5(CHS_GND3) P0.13(CHS_GND1) P0.14(CHS_GND2)
N21752228: R8.2 U6.8(INTN/PWDNN)
N21760792: R29.1 R30.2 U3.29(COL/PHYAD0)
N21760889: R35.1 R36.2 U3.27(CRS/CRS_DV/LED_CFG)
N21760945: P1.9(A_RIGHT) R43.1
N21760963: C41.2 P1.4(CHS_GND4) P1.5(CHS_GND3) P1.13(CHS_GND1) P1.14(CHS_GND2)
N21761103: R40.1 U3.16(RBIAS)
N21761294: R1.2 U3.8(INTN/PWDNN)
N21764803: C7.1 U5.F12(OSC_OUT) Y1.1(Y1)
N21764807: C3.1 U5.G12(OSC_IN) Y1.3(Y2)
N21767563: R19.1 U5.C4(RBIAS)
N21781367: TP7.1 U3.2(TX_CLK)
N21781382: TP11.1 U6.2(TX_CLK)
N21785424: DS1.1(CATHODE) R72.2
N21788279: P1.12(A_LEFT) R14.1
N21789027: P0.12(A_LEFT) R51.1
N21791162: R21.2 TP4.1 U5.F1(TX_ENA{2]/EBUS{2}-TX+)
N21791165: TP5.1 U5.E1(TX_D{2}[1]/EBUS{2}-TX-)
N21791168: TP2.1 U5.J1(RX_D{2}[1]/EBUS{2}-RX+)
N21791171: TP3.1 U5.H1(RX_DV{2}/EBUS{2}-RX-)
N21791186: TP6.1 U5.C1(PDI[31]/CLK25OUT2)
N21791230: R39.2 U5.A4(PDI[22]/TX_D{3}[3]) U5.C10(PDI[05])
N21823994: C4.1 C5.1 J3.3 L2.2 U8.4(FB)
N21823999: L2.1 U8.2(SW)
N21824161: C6.1 C8.1 C9.1 L1.2 U8.5(EN) U8.7(AVIN) U8.8(PVIN)
N21833989: J6.54 R7.1
N21833992: J6.55 R6.2
N21843407: R33.1 SW1.4(A4) U7.1(S)
N21843411: R34.1 SW1.3(A3) U2.19(O\E\)
N21843710: R58.2 U7.15(O\E\)
N21870681: J9.1 J10.3
N21871502: DS2.1(CATHODE) R75.2

Pads without a net: J6 2 46 58 59; NOREF#2 1; NOREF#3 1; NOREF#4 1; NOREF#9 1; NOREF#15 1; NOREF#16 1; NOREF#17 1; NOREF#18 1; R70 1 2; R71 1 2; U1 1; U2 1; U3 22; U6 22

## Via types
v1: diameter 0.508, hole 0.254, TOP to BOTTOM, 306 vias
v2: diameter 0.457, hole 0.203, TOP to BOTTOM, 106 vias
v3: diameter 0.61, hole 0.305, TOP to BOTTOM, 2 vias

## Routing (per net, layer and track width the routed paths; a pad name or vN(x,y) marks a point on that pad's centre or on a via; arc(x,y) is an arc through that point)
GND: length 143
  TOP w0.305: U7.8 v1(71.75,14.34) ; U5.D7 v2(54.47,18.88) ; U5.G3 v2(51.27,22.89) ; U5.D8 v2(54.47,18.08) ; U5.C8 v2(55.27,18.08) ; U5.H4 v2(50.47,22.09) ; U5.F9 v2(52.87,17.28) ; U8.6 v1(59.82,4.31) ; U5.D9 v2(54.47,17.28) ; U5.G9 v2(51.27,17.28) ; SW1.2 SW1.1 v1(61.72,27.31) ; Y1.2 52.53,9.35 52.83,9.65 v1(52.83,10.03) C3.2 ; U2.10 v1(71.56,22.54) ; U5.G4 v2(51.27,22.09) ; v1(54.74,7.37) 55.37,7.37 C6.2 55.37,6.6 v1(54.74,6.6) ; U5.J4 v2(49.67,22.09) ; RJ2.3 v1(57.15,11.43) ; C7.2 v1(50.29,4.7) 50.29,5.08 50.6,5.38 Y1.4 ; U5.D6 v2(54.47,20.49) ; U5.D5 v2(54.47,21.29) ; U5.H10 v2(50.47,16.48) ; RJ1.3 v1(57.91,13.46) ; U5.E10 v2(53.67,16.48) ; v1(62.23,2.67) 62.43,2.87 U8.1 ; U5.J6 v2(49.67,20.49) ; U5.J7 v2(49.67,18.88) ; C5.2 v1(60.71,6.1) ; C8.2 v1(56.9,5.08) ; v1(61.09,8.13) 61.72,8.13 C4.2 61.72,7.37 v1(61.09,7.37) ; U5.K9 v2(48.87,17.28) ; U5.J5 v2(49.67,21.29) ; U5.F4 v2(52.87,22.09) ; U8.3 v1(63.11,4.31) ; C9.2 v1(56.9,3.94) ; U5.D4 v2(54.47,22.09) ; U5.J9 v2(49.67,17.28) ; U5.J8 v2(49.67,18.08) ; U5.H3 v2(50.47,22.89) ; U5.E4 v2(53.67,22.09)
  TOP w0.508: v1(27.43,11.05) 27.94,11.56 C2.2 ; v1(27.56,26.29) 28.07,26.29 C1.2 ; U4.7 v1(54.1,32.39) ; U4.3 v1(51.31,31.11) ; TP15.1 v1(30.86,3.56) ; U1.3 v1(44.42,4.8) ; U4.2 v1(51.31,32.39) ; U4.1 v1(51.31,33.66) ; U4.4 v1(51.31,29.85)
  L2_GND w0.305: J9.2 75.38,2.54 ; J9.2 74.42,1.59 ; J9.2 73.47,2.54 ; J9.2 74.42,3.49
  BOTTOM w0.254: J6.29 65.61,30.68 v1(65.53,30.61) ; J6.1 71.2,30.65 v1(71.25,30.61) ; J6.19 67.6,30.69 v1(67.69,30.61) ; v1(61.33,30.42) 61.33,30.75 61.21,30.87 J6.51 ; J6.42 v1(63.21,35.39) ; J6.10 v1(69.6,35.43)
  BOTTOM w0.305: R75.1 v1(39.5,4.57) R72.1 ; R15.2 R16.2 R17.2 R22.2 R29.2 R31.2 R35.2 R37.2 40.6,26.89 v1(40.39,26.67) ; R48.2 R49.2 R50.2 R52.2 R54.2 R56.2 R61.2 R63.2 v1(41.27,11.56)
  BOTTOM w0.508: C35.2 v1(60.33,24.13) ; R21.1 v1(51.31,33.66) ; C29.2 v1(52.07,27.94) ; C79.2 v1(22.86,9.65) ; C51.2 v1(60.33,17.78) ; R59.2 v1(46.99,11.43) ; R58.1 v1(65.66,10.8) ; C28.2 v1(53.34,27.94) ; C50.2 v1(27.94,18.03) ; C56.2 v1(60.33,15.24) ; C22.2 v1(46.6,28.07) ; C81.2 v1(33.15,7.11) ; C38.2 v1(34.15,22.99) ; C55.2 v1(28.7,17.54) ; R24.2 v1(51.31,29.85) ; C10.2 v1(47.24,3.68) ; R73.2 v1(41.27,4.45) ; R20.2 v1(55.88,27.94) ; C48.2 v1(60.33,19.05) ; C60.1 v1(27.69,12.95) ; C12.2 v1(29.72,31.75) ; C49.2 v1(43.81,19.05) ; 45.72,30.73 v1(45.72,31.5) ; v1(26.67,9.13) C78.2 C74.2 ; C43.2 v1(43.81,21.59) ; v1(23.11,25.65) C33.2 ; R40.2 v1(29.97,22.23) ; C52.2 v1(43.81,17.78) ; C39.2 v1(60.33,22.86) ; v1(23.11,6.6) C82.2 ; v1(20.83,21.34) 20.32,21.34 C41.1 20.32,22.35 v1(20.83,22.35) ; C30.2 v1(50.8,27.94) ; C57.2 v1(43.81,15.24) ; R19.2 v1(58.42,27.94) ; C40.2 v1(43.81,22.86) ; v1(20.83,2.54) 20.32,2.54 C83.1 20.32,1.52 v1(20.83,1.52) ; C77.2 v1(13.08,11.43) ; R18.2 v1(57.15,27.94) ; R45.2 v1(40.64,20.7) ; C37.2 v1(33.15,22.61) ; C47.1 v1(53.98,33.66) ; C11.1 27.05,34.16 v1(26.92,34.29) ; C19.2 v1(66.04,17.14) ; C69.2 v1(14.22,13.46) ; C26.2 C34.2 v1(26.8,24.26) ; C58.1 v1(28.7,13.84) ; 44.58,30.73 v1(44.58,31.5) ; C17.2 v1(27.81,28.19) ; C63.2 v1(54.61,11.43) ; C75.2 v1(65.66,9.65) ; C54.2 v1(43.81,16.51) ; R65.2 v1(29.97,6.98) ; C15.1 v1(28.7,29.08) ; C44.2 v1(61.47,22.11) ; 35.05,7.62 v1(34.02,7.62) ; C42.2 v1(60.33,21.59) ; C62.2 v1(55.88,11.43) ; C66.2 v1(50.8,11.43) ; C64.2 v1(53.34,11.43) ; R39.1 v1(62.74,24.38) ; C53.2 v1(60.33,16.51) ; R67.2 v1(47.5,6.35) ; R46.2 v1(40.64,19.56) ; C36.2 v1(43.81,24.13) ; R47.2 v1(40.64,18.41) ; C46.2 v1(43.81,20.32) ; C27.2 v1(54.61,27.94) ; C31.2 v1(49.53,27.94) ; C67.2 v1(49.53,11.43) ; C65.2 v1(52.07,11.43) ; 43.43,30.73 v1(43.43,31.5) ; C13.2 v1(14.22,32.51) ; C45.2 v1(60.33,20.32) ; C68.2 v1(48.26,11.43) ; C14.2 v1(13.08,30.48) ; C20.2 v1(22.86,28.7)
  vias: v1(32.38,29.97) v1(32.38,28.57) v1(32.38,14.73) v1(32.38,13.34) v1(33.15,29.21) v1(33.15,13.97) v1(33.91,29.97) v1(33.91,28.57) v1(34.04,14.73) v1(34.04,13.34) v3(61.47,4.5) v3(61.47,3.63)
VCC_2V5: length 11.4
  TOP w0.305: U5.C7 v2(55.27,18.88) ; U5.K6 v2(48.87,20.49) ; U5.K7 v2(48.87,18.88) ; U5.G10 v2(51.27,16.48) ; U5.C6 v2(55.27,20.49)
  BOTTOM w0.508: C46.1 v1(46.35,20.32) ; C48.1 v1(57.78,19.05) ; C52.1 v1(46.35,17.78) ; C66.1 v1(50.8,13.97) ; C49.1 v1(46.35,19.05) ; C42.1 v1(57.78,21.59) ; C43.1 v1(46.35,21.59) ; C44.1 v1(61.47,18.78) ; C45.1 v1(57.78,20.32) ; C65.1 v1(52.07,13.97) ; C51.1 v1(57.78,17.78)
VCC_3V3: length 8.2
  TOP w0.305: 73.06,7.24 J3.1 ; J3.1 74.04,6.26 ; J3.1 74.04,8.22 ; J3.1 75.02,7.24
  BOTTOM w0.254: J6.53 60.81,30.58 60.71,30.48 v1(60.71,29.97) ; v1(59.82,30.61) 60.01,30.8 J6.57 ; J6.52 61.21,35.17 v1(61.47,35.43) ; v1(60.33,35.43) 60.41,35.35 J6.56
CLK_MODE[0]: length 9
  TOP w0.127: v1(47.5,8.89) 47.5,9.53 49.02,11.05 49.02,14.1 49.67,14.74 49.67,15.68 U5.J11
  BOTTOM w0.127: v1(47.5,8.89) R67.1
CLK_MODE[1]: length 6.5
  TOP w0.305: U5.K2 v2(48.87,23.69)
  BOTTOM w0.127: v2(48.87,23.69) 48.28,24.27 48.28,24.79 48.77,25.27 48.77,28.07 R24.1
EEPROM_SIZE: length 17.9
  TOP w0.127: v1(43.05,5.71) DS1.2
  TOP w0.305: U5.H11 v2(50.47,15.68)
  BOTTOM w0.127: R73.1 v1(43.05,5.71) 43.05,12.32 45.09,14.35 46.74,14.35 48.07,15.68 v2(50.47,15.68)
EM2A9: length 26.8
  TOP w0.127: v1(71.5,18.03) 70.93,17.46 U2.2
  BOTTOM w0.127: v1(71.5,18.03) 72.52,19.05 73.03,19.05 73.53,19.56 73.53,21.08 74.42,21.97 74.42,34.16 72.42,36.17 69.57,36.17 69.16,35.76 69.16,35.24 69.2,35.2 J6.12
EM2A10: length 16.6
  TOP w0.127: U2.3 v1(67.69,18.1)
  BOTTOM w0.127: v1(67.69,18.1) 67.18,18.61 67.18,19.81 67.82,20.45 67.82,27.81 68.8,28.8 J6.13
EM2A11: length 27.4
  TOP w0.127: v1(73.98,20.32) 73.03,20.32 71.44,18.73 U2.4
  BOTTOM w0.127: v1(73.98,20.32) 74.74,21.08 74.74,34.48 72.72,36.5 69.39,36.5 68.89,36 68.89,35.24 68.8,35.15 J6.14
EM2D1: length 18.1
  TOP w0.127: v1(67.69,19.18) 68.14,19.18 68.33,19.37 U2.5
  L4_ROUTE w0.127: v1(67.2,33.02) 67.2,28.3 67.75,27.75 67.75,19.68 67.69,19.62 v1(67.69,19.18)
  BOTTOM w0.127: J6.22 v1(67.2,33.02)
EM2D2: length 14.3
  TOP w0.127: U2.7 68.26,20.64 68.07,20.83 v1(66.93,20.83)
  BOTTOM w0.127: v1(66.93,20.83) 66.93,22.48 66.29,23.11 66.29,23.62 66.8,24.13 J6.23
EM2D3: length 23.2
  TOP w0.127: U2.6 68.39,20 68.07,19.68 v1(66.04,19.68)
  L4_ROUTE w0.127: v1(66.04,19.68) 66.04,20.13 66.03,20.13 66.03,20.95 67.25,22.16 67.25,27.5 66.67,28.07 66.67,34.42 66.99,34.73 v1(66.99,36.19)
  BOTTOM w0.127: J6.24 66.8,35.06 66.99,35.25 v1(66.99,36.19)
EM2D4: length 13.6
  TOP w0.127: U2.8 68.64,21.27 67.69,22.23 v1(66.42,22.23)
  BOTTOM w0.127: v1(66.42,22.23) 65.98,22.67 65.98,23.94 66.41,24.37 J6.25
EM2D11: length 14.1
  TOP w0.127: v1(64.52,24.26) 66.55,24.26 68.9,21.91 U2.9
  BOTTOM w0.127: J6.37 64.01,31.08 63.94,31.02 63.94,30.04 64.26,29.72 64.26,28.7 64.64,28.32 64.64,24.83 64.52,24.7 v1(64.52,24.26)
ET_ADDR1: length 27.9
  TOP w0.305: U5.B5 v2(56.07,21.29)
  L3_ROUTE w0.127: v1(72.77,23.5) 70.23,23.5 68.45,21.72 65.02,21.72 64.52,21.21 61.38,21.21 60.49,22.1 57.53,22.1 57.12,21.69 56.48,21.69 v2(56.07,21.29)
  BOTTOM w0.127: J6.3 70.8,30.79 70.79,30.78 70.79,30.3 72.96,28.13 72.96,24.7 72.77,24.51 v1(72.77,23.5)
ET_ADDR2: length 32.4
  TOP w0.305: U5.A5 v2(56.87,21.29)
  L3_ROUTE w0.127: v1(72.77,22.48) 72.39,22.1 69.6,22.1 68.78,21.29 64.95,21.29 64.62,20.96 60.96,20.96 60.77,21.15 60.14,21.15 60,21.29 58.11,21.29 57.97,21.15 57.6,21.15 57.46,21.29 v2(56.87,21.29)
  BOTTOM w0.127: v1(72.77,22.48) 73.28,22.99 73.28,33.66 71.75,35.18 70.93,35.18 70.8,35.05 J6.4
ET_ADDR3: length 28.2
  TOP w0.305: U5.B6 v2(56.07,20.49)
  L3_ROUTE w0.127: v2(56.07,20.49) 56.48,20.89 57.78,20.89 57.91,20.76 60.64,20.76 60.83,20.57 66.42,20.57 66.68,20.32 68.83,20.32 69.98,21.46 v1(71.63,21.46)
  BOTTOM w0.127: v1(71.63,21.46) 72.14,21.97 72.14,24.64 72.52,25.02 72.52,28.07 70.4,30.18 J6.5
ET_ADDR4: length 34.7
  TOP w0.305: U5.A6 v2(56.87,20.49)
  L3_ROUTE w0.127: v2(56.87,20.49) 57.42,19.94 57.54,19.94 57.6,19.88 60.9,19.88 61.15,20.13 66.36,20.13 66.55,19.94 69.34,19.94 69.98,20.57 v1(71.63,20.57)
  BOTTOM w0.127: v1(71.63,20.57) 73.66,22.61 73.66,33.78 71.93,35.51 70.81,35.51 70.4,35.1 J6.6
ET_ADDR5: length 30.3
  TOP w0.305: U5.B7 v2(56.07,18.88)
  L3_ROUTE w0.127: v2(56.07,18.88) 56.87,19.68 57.31,19.68 57.44,19.56 65.28,19.56 65.66,19.18 66.67,19.18 67.12,19.62 v1(71.63,19.62)
  BOTTOM w0.127: J6.7 70,30.07 72.2,27.88 72.2,25.59 71.12,24.51 71.12,20.13 v1(71.63,19.62)
ET_ADDR6: length 38.2
  TOP w0.305: U5.A7 v2(56.87,18.88)
  L3_ROUTE w0.127: v2(56.87,18.88) 57.32,18.88 57.54,18.67 57.6,18.61 60.64,18.61 61.34,19.3 64.64,19.3 65.28,18.67 72.01,18.67 v1(73.03,19.68)
  BOTTOM w0.127: v1(73.03,19.68) 73.03,21.21 74.04,22.23 74.04,33.91 72.11,35.84 70.65,35.84 70,35.2 J6.8
ET_ADDR7: length 28.2
  TOP w0.305: U5.B8 v2(56.07,18.08)
  L3_ROUTE w0.127: v1(68.58,17.4) 66.8,17.4 65.98,18.22 57.49,18.22 57.24,18.48 56.46,18.48 v2(56.07,18.08)
  BOTTOM w0.127: J6.9 69.6,28.58 68.58,27.56 v1(68.58,17.4)
ET_ADDR8: length 27.5
  TOP w0.305: U5.A8 v2(56.87,18.08)
  L3_ROUTE w0.127: v1(67.82,16.89) 67.44,16.51 62.48,16.51 61.66,17.34 57.6,17.34 57.15,17.79 57.15,17.81 v2(56.87,18.08)
  BOTTOM w0.127: v1(67.82,16.89) 67.82,17.4 68.2,17.78 68.2,27.69 69.2,28.69 J6.11
ET_ADDR9: length 9.6
  TOP w0.127: U5.B9 56.07,17.28 56.88,17.28 57.15,17.02 62.23,17.02 63.31,18.1 U2.18
ET_ADDR10: length 8.8
  TOP w0.127: U2.17 63.44,18.73 62.04,17.34 57.34,17.34 56.99,17.68 U5.A9
ET_ADDR11: length 10.9
  TOP w0.127: v1(61.47,17.78) 63.06,19.37 U2.16
  TOP w0.305: U5.C9 v2(55.27,17.28)
  BOTTOM w0.127: v2(55.27,17.28) 57.14,17.28 57.28,17.14 60.83,17.14 v1(61.47,17.78)
ET_ADDR12: length 28.3
  TOP w0.127: v1(68.29,16.29) 67.98,15.97 57.69,15.97 56.78,16.88 U5.A10
  L4_ROUTE w0.127: v1(68.29,16.29) 69.22,17.21 69.22,24.13 68.33,25.02 v1(68.33,29.08)
  BOTTOM w0.127: J6.15 68.4,29.67 68.33,29.59 v1(68.33,29.08)
ET_ADDR13: length 36.3
  TOP w0.127: v1(69.09,15.49) 68.64,15.49 68.42,15.72 57.56,15.72 56.79,16.48 56.07,16.48 U5.B10
  L4_ROUTE w0.127: v1(68.39,35.58) 68.39,35.14 68.4,35.12 68.4,33.4 70.23,31.57 70.23,17.08 69.09,15.94 v1(69.09,15.49)
  BOTTOM w0.127: J6.16 68.4,35.12 68.39,35.14 v1(68.39,35.58)
ET_ADDR14: length 4.4
  TOP w0.127: U5.A11 57.34,15.21 57.34,14.8 58.93,13.21 RJ1.2
ET_ADDR15: length 6.5
  TOP w0.127: RJ2.2 58.29,12.07 57.53,12.07 57.28,12.32 57.28,13.84 56.07,15.05 56.07,15.68 U5.B11
ET_BUSY: length 24.4
  TOP w0.127: U7.11 v1(62.87,13.04)
  L4_ROUTE w0.127: v1(62.87,13.04) 63.88,14.06 63.88,22.48 63.37,22.99 63.37,24.64 62.61,25.4 62.61,32 v1(61.59,33.02)
  BOTTOM w0.127: v1(61.59,33.02) 61.59,34 61.61,34.01 J6.50
ET_BUSY/SPI_DO: length 15.5
  TOP w0.127: U5.C11 55.27,15.68 55.27,14.71 55.44,14.54 55.44,13.14 56.52,12.07 56.52,11.3 57.02,10.8 60.45,10.8 61.34,11.68 61.34,12.57 63.11,14.34 U7.9
ET_CS: length 23.6
  TOP w0.127: U7.5 v1(68.33,12.39)
  BOTTOM w0.127: v1(68.33,12.39) 66.29,14.42 66.29,15.75 66.55,16 66.55,17.65 64.07,20.13 64.07,25.08 63.63,25.53 63.63,27.43 62.74,28.32 62.74,30.87 62.81,30.94 J6.43
ET_CS/SPI_CLK: length 24.6
  TOP w0.127: U5.D12 54.07,10.95 55.12,9.91 61.59,9.91 62.29,9.21 66.23,9.21 67.31,10.29 67.31,12.83 68.17,13.69 U7.7
ET_DATA0: length 20.8
  TOP w0.305: U5.B4 v2(56.07,22.09)
  L3_ROUTE w0.127: v1(66.8,23.3) 65.6,23.3 63.94,21.65 61.3,21.65 60.53,22.42 57.1,22.42 57.03,22.48 56.46,22.48 v2(56.07,22.09)
  BOTTOM w0.127: J6.21 67.2,23.71 v1(66.8,23.3)
ET_DATA1: length 9.2
  TOP w0.127: U2.15 62.29,20 61.34,20.96 59.82,20.96 58.67,22.1 57.66,22.1 57.28,22.48 56.83,22.48 56.82,22.49 U5.A3
ET_DATA2: length 10.6
  TOP w0.127: U2.13 63.44,21.27 62.99,21.72 62.99,22.35 61.85,23.5 57.66,23.5 57.05,22.89 56.07,22.89 U5.B3
ET_DATA3: length 10
  TOP w0.127: U2.14 63.25,20.64 62.42,21.47 62.42,22.16 v1(62.1,22.48)
  TOP w0.305: U5.A2 v2(56.87,23.69)
  L3_ROUTE w0.127: v2(56.87,23.69) 57.14,23.42 61.17,23.42 v1(62.1,22.48)
ET_DATA4: length 9.9
  TOP w0.127: U2.12 63.51,21.91 63.37,22.05 63.37,22.61 61.72,24.26 61.21,24.26 60.71,24.77 57.15,24.77 U5.A1
ET_DATA5: length 22.8
  TOP w0.127: U5.B2 56.07,23.69 56.07,24.19 57.53,25.65 61.59,25.65 62.1,25.15 65.2,25.15 v1(65.96,25.91)
  L4_ROUTE w0.127: v1(65.96,25.91) 66.28,26.22 66.28,34.72 66.55,34.99 v1(66.55,35.43)
  BOTTOM w0.127: J6.26 66.41,35.29 v1(66.55,35.43)
ET_DATA6: length 14.9
  TOP w0.127: U5.B1 55.67,24.44 58.16,26.92 60.33,26.92 61.47,28.07 64.9,28.07 v1(65.79,28.96)
  BOTTOM w0.127: J6.27 66,30.19 65.79,29.97 v1(65.79,28.96)
ET_DATA7: length 22.6
  TOP w0.127: v1(58.04,34.04) 58.04,29.59 56.39,27.94 56.39,25.78 55.27,24.66 55.27,23.69 U5.C2
  L3_ROUTE w0.127: v1(58.04,34.04) 64.14,34.04 v1(66.17,36.07)
  BOTTOM w0.127: J6.28 66,35.91 v1(66.17,36.07)
ET_DATA8: length 22.6
  TOP w0.127: v1(64.33,36.27) 63.96,36.64 57.98,36.64 v1(56.64,35.31)
  TOP w0.305: U5.D1 v2(54.47,24.49)
  L4_ROUTE w0.127: v1(56.64,35.31) 56.64,29.59 55.24,28.19 55.24,25.26 v2(54.47,24.49)
  BOTTOM w0.127: v1(64.33,36.27) 64.85,35.75 64.85,35.23 64.81,35.19 J6.34
ET_DATA9: length 20.4
  TOP w0.305: U5.D2 v2(54.47,23.69)
  L3_ROUTE w0.127: v2(54.47,23.69) 55.42,24.64 60.96,24.64 62.23,23.37 v1(64.83,23.37)
  BOTTOM w0.127: J6.35 64.41,31.01 64.2,30.8 64.2,30.29 64.64,29.85 64.64,28.83 65.02,28.45 65.02,24 64.83,23.81 v1(64.83,23.37)
ET_DATA10: length 25
  TOP w0.305: U5.E2 v2(53.67,23.69)
  L3_ROUTE w0.127: v1(64.41,35.42) 63.88,35.94 63.88,36.58 63.25,37.21 56.64,37.21 v1(55.63,36.19)
  L4_ROUTE w0.127: v2(53.67,23.69) 53.67,24.71 53.91,24.96 53.91,28.26 54.86,29.21 54.86,35.43 v1(55.63,36.19)
  BOTTOM w0.127: J6.36 v1(64.41,35.42)
ET_DATA11: length 15.2
  TOP w0.127: v1(61.34,25.09) 63.62,22.81 63.62,22.8 63.88,22.54 U2.11
  TOP w0.305: U5.G1 v2(51.27,24.49)
  L3_ROUTE w0.127: v1(61.34,25.09) 55.18,25.09 55.05,24.96 53.91,24.96 53.44,24.49 v2(51.27,24.49)
ET_DATA12: length 26.8
  TOP w0.305: U5.G2 v2(51.27,23.69)
  BOTTOM w0.127: v2(51.27,23.69) 51.66,24.08 51.66,24.79 51.44,25.02 51.44,28.57 53.09,30.23 53.09,35.18 54.99,37.08 63.25,37.08 63.75,36.58 63.75,36.05 63.9,35.9 63.9,35.29 64.01,35.19 J6.38
ET_DATA13: length 21.9
  TOP w0.305: U5.H2 v2(50.47,23.69)
  L3_ROUTE w0.127: v1(64.14,25.78) 62.23,25.78 61.98,26.04 51.69,26.04 51.31,25.65 51.31,25.15 50.47,24.31 v2(50.47,23.69)
  BOTTOM w0.127: v1(64.14,25.78) 64.14,28.19 63.88,28.45 63.88,29.59 63.61,29.87 J6.39
ET_DATA14: length 28.3
  TOP w0.305: U5.J2 v2(49.67,23.69)
  L3_ROUTE w0.127: v1(50.16,35.56) 56.01,35.56 57.28,36.83 62.61,36.83 v1(63.25,36.19)
  L4_ROUTE w0.127: v2(49.67,23.69) 49.67,24.52 50.16,25.02 v1(50.16,35.56)
  BOTTOM w0.127: J6.40 63.61,35.17 63.65,35.21 63.65,35.79 v1(63.25,36.19)
ET_DATA15: length 20.1
  TOP w0.305: U5.K1 v2(48.87,24.49)
  L3_ROUTE w0.127: v1(63.25,28.7) 61.72,28.7 59.56,26.54 49.78,26.54 48.87,25.63 v2(48.87,24.49)
  BOTTOM w0.127: J6.41 63.21,29.19 63.25,29.15 v1(63.25,28.7)
ET_EE_LOADED: length 61.3
  TOP w0.127: TP16.1 45.34,37.08 67.31,37.08 v1(67.69,36.7)
  TOP w0.305: U5.A12 v2(56.87,14.88)
  L3_ROUTE w0.127: v1(68.2,14.99) 67.75,14.54 57.21,14.54 v2(56.87,14.88)
  L4_ROUTE w0.127: v1(67.69,36.7) 67.69,35.18 68.07,34.8 68.07,32.89 69.85,31.11 69.85,17.14 68.2,15.49 v1(68.2,14.99)
  BOTTOM w0.127: J6.20 67.6,36.17 67.69,36.26 v1(67.69,36.7)
ET_IRQ/SPI_IRQ: length 24.7
  TOP w0.127: U5.B12 55.67,14.93 56.39,14.21 56.39,13.97 v1(56.77,13.59)
  L4_ROUTE w0.127: v1(61.59,29.72) 61.59,28.57 60.9,27.88 60.9,24.44 62.74,22.61 62.74,17.91 60.71,15.88 59.5,15.88 57.21,13.59 v1(56.77,13.59)
  BOTTOM w0.127: J6.49 61.61,30.94 61.78,30.76 61.78,29.91 v1(61.59,29.72)
ET_RD: length 33
  TOP w0.127: U7.2 68.43,10.44 v1(67.94,10.92)
  L4_ROUTE w0.127: v1(67.94,10.92) 66.42,10.92 64.39,12.95 64.39,22.73 63.88,23.24 63.88,24.89 63.63,25.15 63.63,26.16 63.82,26.35 63.82,33.21 62.36,34.67 v1(62.36,36.19)
  BOTTOM w0.127: J6.44 62.81,35.16 62.67,35.3 62.67,35.88 v1(62.36,36.19)
ET_RD/SPI_SEL: length 18.8
  TOP w0.127: U7.4 69.22,11.74 69.16,11.68 v1(67.94,11.68)
  TOP w0.305: U5.D11 v2(54.47,15.68)
  L3_ROUTE w0.127: v2(54.47,15.68) 54.47,15.13 55.12,14.48 55.12,13.72 56.51,12.32 66.68,12.32 67.31,11.68 v1(67.94,11.68)
ET_RESETN: length 47.2
  TOP w0.127: v1(45.34,5.97) 45.85,5.46 U1.2
  L4_ROUTE w0.127: v1(45.34,5.97) 45.34,9.91 44.45,10.8 44.45,26.92 45.21,27.69 45.21,32.13 49.91,36.83 56.52,36.83 57.91,35.43 v1(59.44,35.43)
  BOTTOM w0.127: 59.61,34.38 J6.60 59.61,35.26 v1(59.44,35.43) ; v1(45.34,5.97) 45.21,5.84 R13.1
ET_SCL: length 24.4
  TOP w0.127: v1(53.85,31.11) U4.6 v1(57.53,31.11)
  TOP w0.305: U5.G11 v2(51.27,15.68)
  L4_ROUTE w0.127: v1(53.85,31.11) 51.44,28.7 51.44,25.02 51.82,24.64 51.82,16.23 v2(51.27,15.68)
  BOTTOM w0.127: R44.1 v1(57.53,31.11) 57.53,31.75 57.15,32.13 R7.2
ET_SDA: length 21.8
  TOP w0.127: v1(57.53,29.85) U4.5 v1(53.47,29.85)
  TOP w0.305: U5.F11 v2(52.87,15.68)
  L4_ROUTE w0.127: v2(52.87,15.68) 52.2,16.36 52.2,24.64 52.58,25.02 52.58,28.96 v1(53.47,29.85)
  BOTTOM w0.127: R42.1 v1(57.53,29.85) R6.1
ET_SPI_CLK: length 22
  TOP w0.127: U7.6 v1(68.83,13.04)
  BOTTOM w0.127: v1(68.83,13.04) 68.37,13.04 66.67,14.73 66.67,15.49 66.93,15.75 66.93,17.91 65.47,19.37 65.47,28.51 65.09,28.89 65.09,30.79 65.2,30.91 J6.31
ET_SPI_DI: length 29.9
  TOP w0.127: U7.13 v1(66.42,11.74)
  L4_ROUTE w0.127: v1(66.42,11.74) 66.42,15.49 66.55,15.62 66.55,18.03 65.53,19.05 65.53,21.46 65.66,21.59 65.66,25.02 65.09,25.59 65.09,31.31 65.28,31.5 65.28,36.25 65.15,36.39 v1(65.15,36.58)
  BOTTOM w0.127: v1(65.15,36.58) 65.15,36.11 65.2,36.05 J6.32
ET_SPI_DO: length 20
  TOP w0.127: v1(65.79,13.69) U7.10
  L4_ROUTE w0.127: v1(65.79,13.69) 65.79,16.13 65.02,16.89 65.02,22.23 65.28,22.48 65.28,24.51 64.64,25.15 v1(64.64,30.61)
  BOTTOM w0.127: J6.33 64.81,30.77 v1(64.64,30.61)
ET_SPI_SEL: length 41.6
  TOP w0.127: U7.3 v1(71.88,11.09)
  BOTTOM w0.127: J6.30 65.61,36.14 66.63,37.16 73.2,37.16 76.58,33.78 76.58,13.97 73.7,11.09 v1(71.88,11.09)
ET_SYNC0: length 25
  TOP w0.305: U5.E11 v2(53.67,15.68)
  BOTTOM w0.127: v2(53.67,15.68) 54.06,16.08 56.31,16.08 56.52,15.88 60.45,15.88 63.37,18.8 63.37,24.64 62.61,25.4 62.61,27.18 62.04,27.75 62.04,30.87 62.01,30.9 J6.47
ET_SYNC1: length 31.8
  TOP w0.305: U5.E12 v2(53.67,14.88)
  L4_ROUTE w0.127: v1(54.23,34.8) 54.55,34.48 54.55,30.04 52.9,28.38 52.9,24.7 53.26,24.33 53.26,15.29 v2(53.67,14.88)
  BOTTOM w0.127: v1(54.23,34.8) 54.86,35.43 55.63,35.43 56.9,36.7 61.21,36.7 62.01,35.91 J6.48
ET_WR: length 23
  TOP w0.127: U7.14 63.2,11.09 v1(62.61,11.68)
  BOTTOM w0.127: J6.45 62.41,28.02 63.25,27.18 63.25,25.27 63.75,24.77 63.75,18.67 62.29,17.21 62.29,12 v1(62.61,11.68)
ET_WR/SPI_DI: length 14.6
  TOP w0.127: U7.12 62.56,12.39 60.58,10.41 55.75,10.41 55.12,11.05 55.12,14.35 54.87,14.6 U5.C12
EVM_3V3: length 121.7
  TOP w0.254: U3.14 29.21,28.46 v1(29.21,28.45) ; v1(29.21,13.21) 29.21,13.22 U6.14
  TOP w0.305: R9.2 v1(26.16,17.27) ; U5.J10 v2(49.67,16.48) ; R8.1 v1(31.11,21.59) ; R5.2 26.92,28.32 v1(27.05,28.19) ; R12.2 v1(26.92,12.95) ; U5.H9 v2(50.47,17.28) ; R3.2 v1(26.16,31.24) ; U5.F10 v2(52.87,16.48) ; U5.C5 v2(55.27,21.29) ; U6.21 33.4,10.41 v1(33.15,10.16) ; v1(63.06,9.72) 63.13,9.79 U7.16 ; v1(29.21,28.45) 29.21,28.45 C1.1 ; R4.2 v1(26.16,30.23) ; v1(44.45,3.94) 42.9,3.94 DS2.2 ; v1(29.21,13.21) 28.96,13.21 C2.1 ; R2.2 v1(26.16,32.51) ; R10.2 v1(26.16,16) ; R1.1 v1(33.02,36.07) ; U5.J3 v2(49.67,22.89) ; U5.K8 v2(48.87,18.08) ; v1(33.15,25.4) 33.4,25.65 U3.21 ; U5.D10 v2(54.47,16.48) ; U5.F3 v2(52.87,22.89) ; U5.E9 v2(53.67,17.28) ; R11.2 v1(26.16,14.99) ; U5.K5 v2(48.87,21.29) ; U5.D3 v2(54.47,22.89) ; U2.20 63.44,16.83 v1(63.25,17.02)
  TOP w0.508: U1.5 v1(47.24,2.82) ; U4.8 v1(55.79,34.51)
  L5_PWR w0.305: 19.81,6.72 P0.3 ; P0.3 19.81,8.52 ; P0.3 20.71,7.62 ; P0.3 18.91,7.62 ; 16.37,30.48 P1.6 ; P1.6 17.27,31.38 ; P1.6 18.17,30.48 ; P1.6 17.27,29.58 ; J3.2 72.04,8.14 ; J3.2 71.14,7.24 ; J3.2 72.04,6.34 ; J3.2 72.94,7.24 ; 16.37,11.43 P0.6 ; P0.6 18.17,11.43 ; P0.6 17.27,10.53 ; P0.6 17.27,12.33 ; 19.81,25.77 P1.3 ; P1.3 20.71,26.67 ; P1.3 18.91,26.67 ; P1.3 19.81,27.57
  BOTTOM w0.305: v1(29.21,28.45) 29.85,28.45 C18.1 ; C61.1 29.85,13.21 v1(29.21,13.21) ; R64.1 v1(37.88,10.91) ; R38.1 v1(37.88,26.84) ; R43.2 v1(28.07,21.08)
  BOTTOM w0.381: R41.1 v1(27.65,24.26) ; R64.1 R62.1 R57.1 R55.1 R53.1 ; R23.1 R30.1 R32.1 R36.1 R38.1 ; v1(27.43,7.37) 27.39,7.33 R69.1
  BOTTOM w0.508: C78.1 28.7,10.16 29.34,10.8 v1(29.34,11.43) C76.1 ; C32.1 v1(29.34,26.67) 29.34,26.16 28.57,25.4 C34.1 ; C62.1 v1(55.88,13.97) ; C57.1 v1(46.35,15.24) ; R13.2 v1(44.45,3.94) ; v1(55.79,34.51) 55.75,34.47 C47.2 ; v1(47.24,2.82) 47.09,2.67 C10.1 ; v1(33.15,25.4) 33.78,26.04 C24.1 ; v1(33.15,25.4) C37.1 ; v1(33.15,25.4) 32.51,26.04 C25.1 ; P1.6 C14.1 ; C81.1 v1(33.15,10.16) ; v1(33.15,10.16) 33.78,10.8 C72.1 ; v1(33.15,10.16) 32.51,10.8 C73.1 ; C13.1 v1(15.24,32.51) ; C67.1 v1(49.53,13.97) ; C64.1 v1(53.34,13.97) ; C29.1 v1(52.07,25.4) ; C27.1 v1(54.61,25.4) ; C69.1 v1(15.24,13.46) ; 46.86,30.73 v1(46.86,31.5) ; C56.1 v1(57.78,15.24) ; v1(26.92,12.95) 26.67,13.21 C60.2 ; C38.1 v1(34.15,24.51) ; C53.1 v1(57.78,16.51) ; R60.2 v1(45.72,11.43) ; C30.1 v1(50.8,25.4) ; C79.1 v1(21.84,9.65) ; v1(21.46,35.05) R14.2 ; R51.2 v1(21.46,13.97) ; C22.1 v1(47.62,25.64) ; C12.1 26.67,31.75 v1(26.16,31.24) ; C80.1 v1(34.02,9.14) ; v1(63.06,9.72) 63.12,9.65 C75.1 ; v1(26.16,16) 26.67,16.51 C55.1 ; C15.2 v1(26.16,30.23) ; C17.1 26.8,28.45 v1(27.05,28.19) ; C11.2 v1(26.16,32.51) ; C20.1 v1(21.84,28.7) ; R44.2 R42.2 v1(55.37,29.08) ; C35.1 v1(57.78,24.13) ; R74.2 v1(27.81,5.08) ; v1(63.25,17.02) 63.37,17.14 C19.1 ; C31.1 v1(49.53,25.4) ; P0.6 C77.1 ; C28.1 v1(53.34,25.4) ; C33.1 P1.3 ; C68.1 v1(48.26,13.97) ; R68.2 v1(46.35,6.35) ; C39.1 v1(57.78,22.86) ; R66.2 v1(48.64,6.35) ; C36.1 v1(46.35,24.13) ; C50.1 v1(26.16,17.27) ; R34.2 v1(69.22,26.04) ; C63.1 v1(54.61,13.97) ; C58.2 v1(26.16,14.99) ; R33.2 v1(69.22,27.31) ; C54.1 v1(46.35,16.51) ; C40.1 v1(46.35,22.86) ; C82.1 P0.3
GPIO93: length 25.4
  TOP w0.127: v1(67.18,15.11) 62.36,15.11 RJ1.1
  BOTTOM w0.127: v1(67.18,15.11) 67.18,18.16 66.8,18.54 66.8,19.94 67.56,20.7 67.56,29.46 68.14,30.04 68.14,30.79 68,30.92 J6.17
GPIO94: length 48.9
  TOP w0.127: RJ2.1 60.45,11.43 60.83,11.81 60.83,12.57 63.12,14.86 65.91,14.86 66.42,14.35 v1(68.83,14.35)
  BOTTOM w0.127: v1(68.83,14.35) 69.47,13.72 74.68,13.72 76.2,15.24 76.2,33.53 72.9,36.83 68.83,36.83 67.94,35.94 67.94,35.4 68,35.34 J6.18
